# Altium PCB 200G_TX_PCB3.PcbDoc
Units mil, origin at the board's own origin, x right, y up, seen from the top; angles counter-clockwise.
Board outline 4482 x 4168 mil, 4 copper layers (Top Layer, GND, VDD, Bottom Layer), stack 61.811 mil thick; 120 components, 47 nets, 333 pads, 1738 vias.
Unrouted connection lines stored in the file: 11.
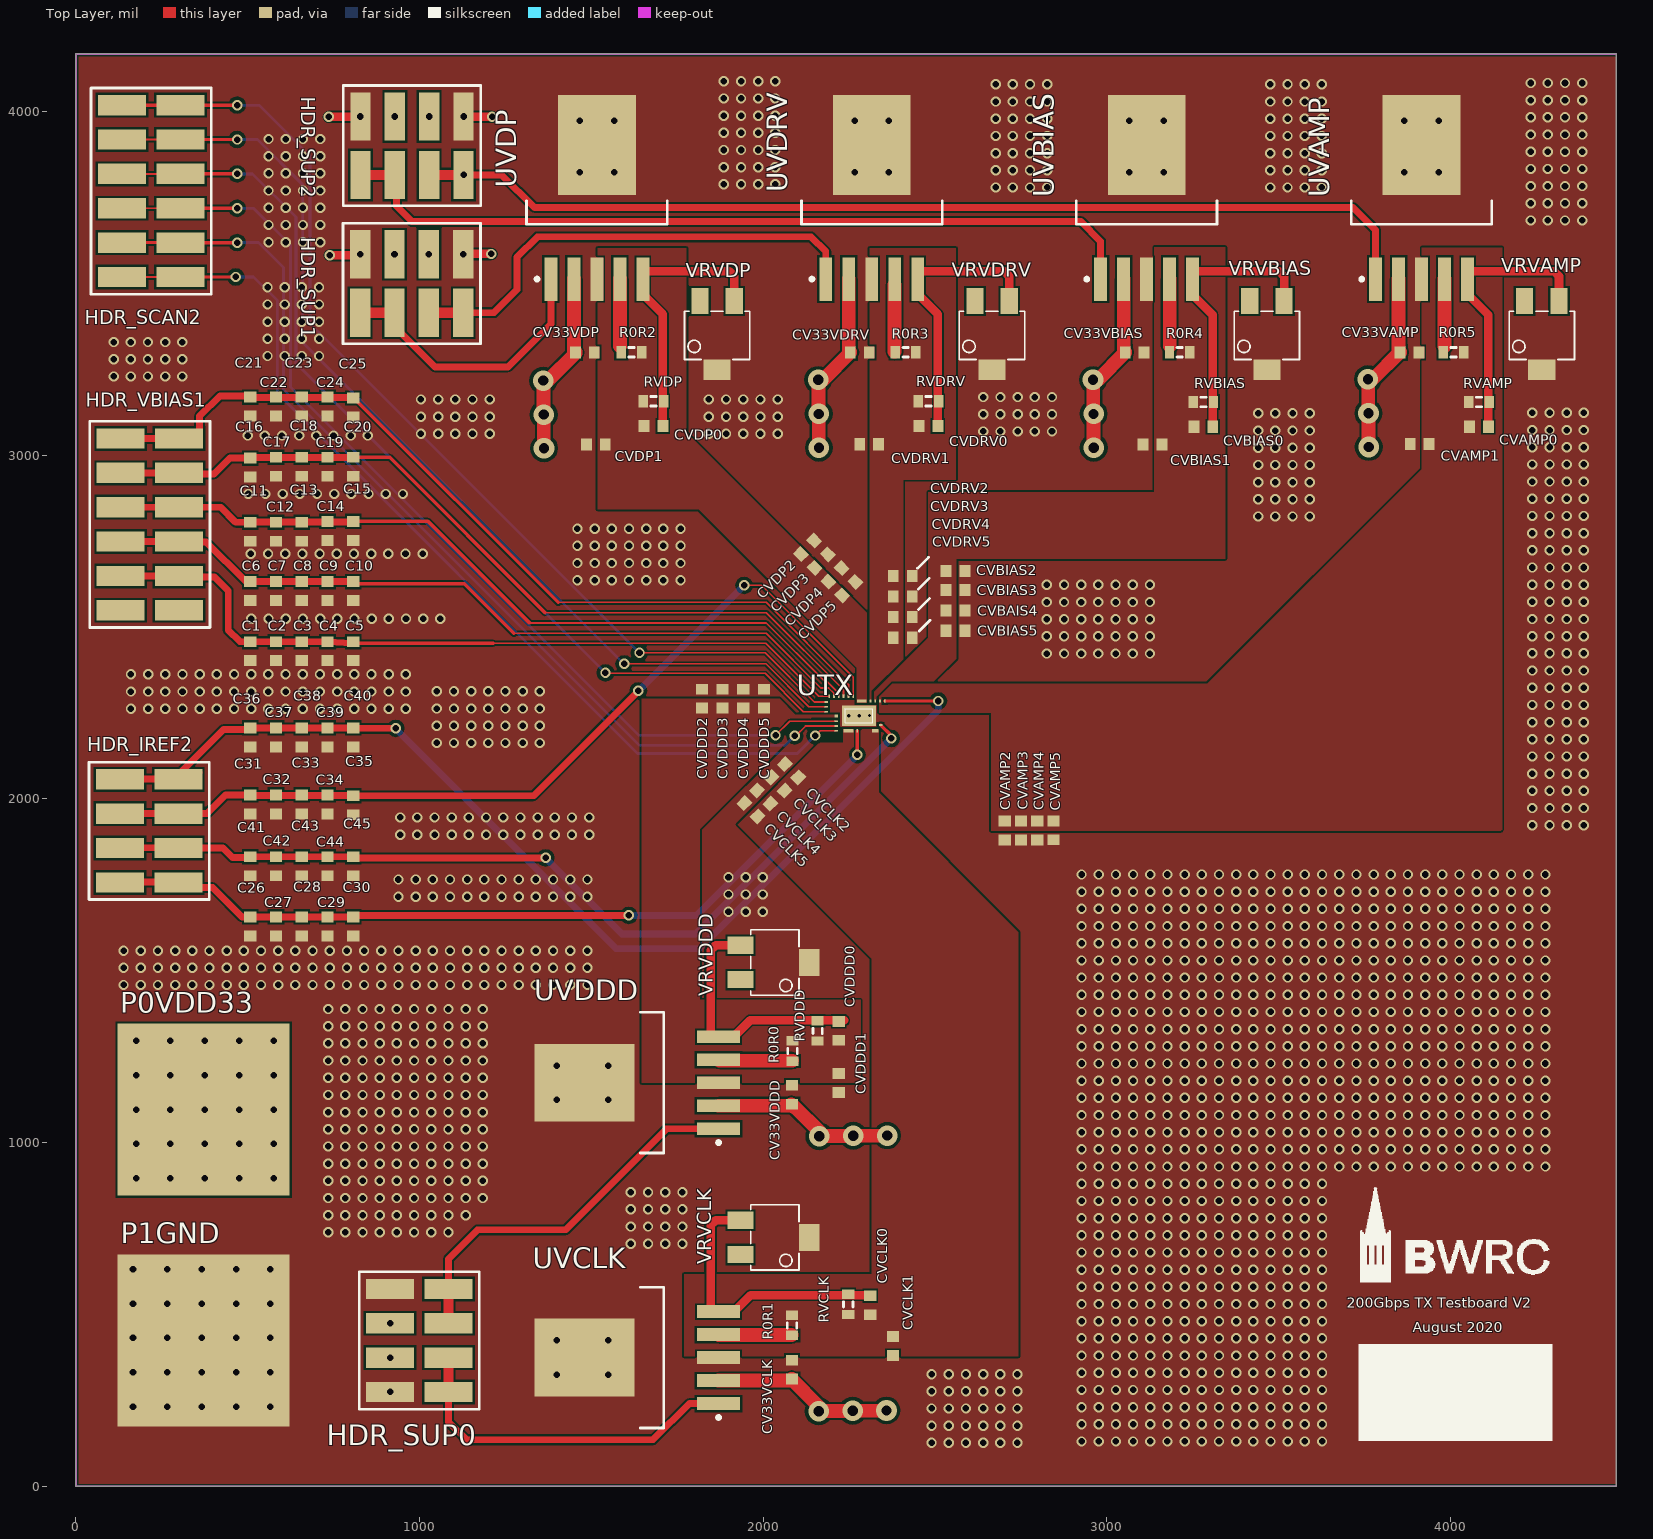
[diagram p0: Top Layer view]
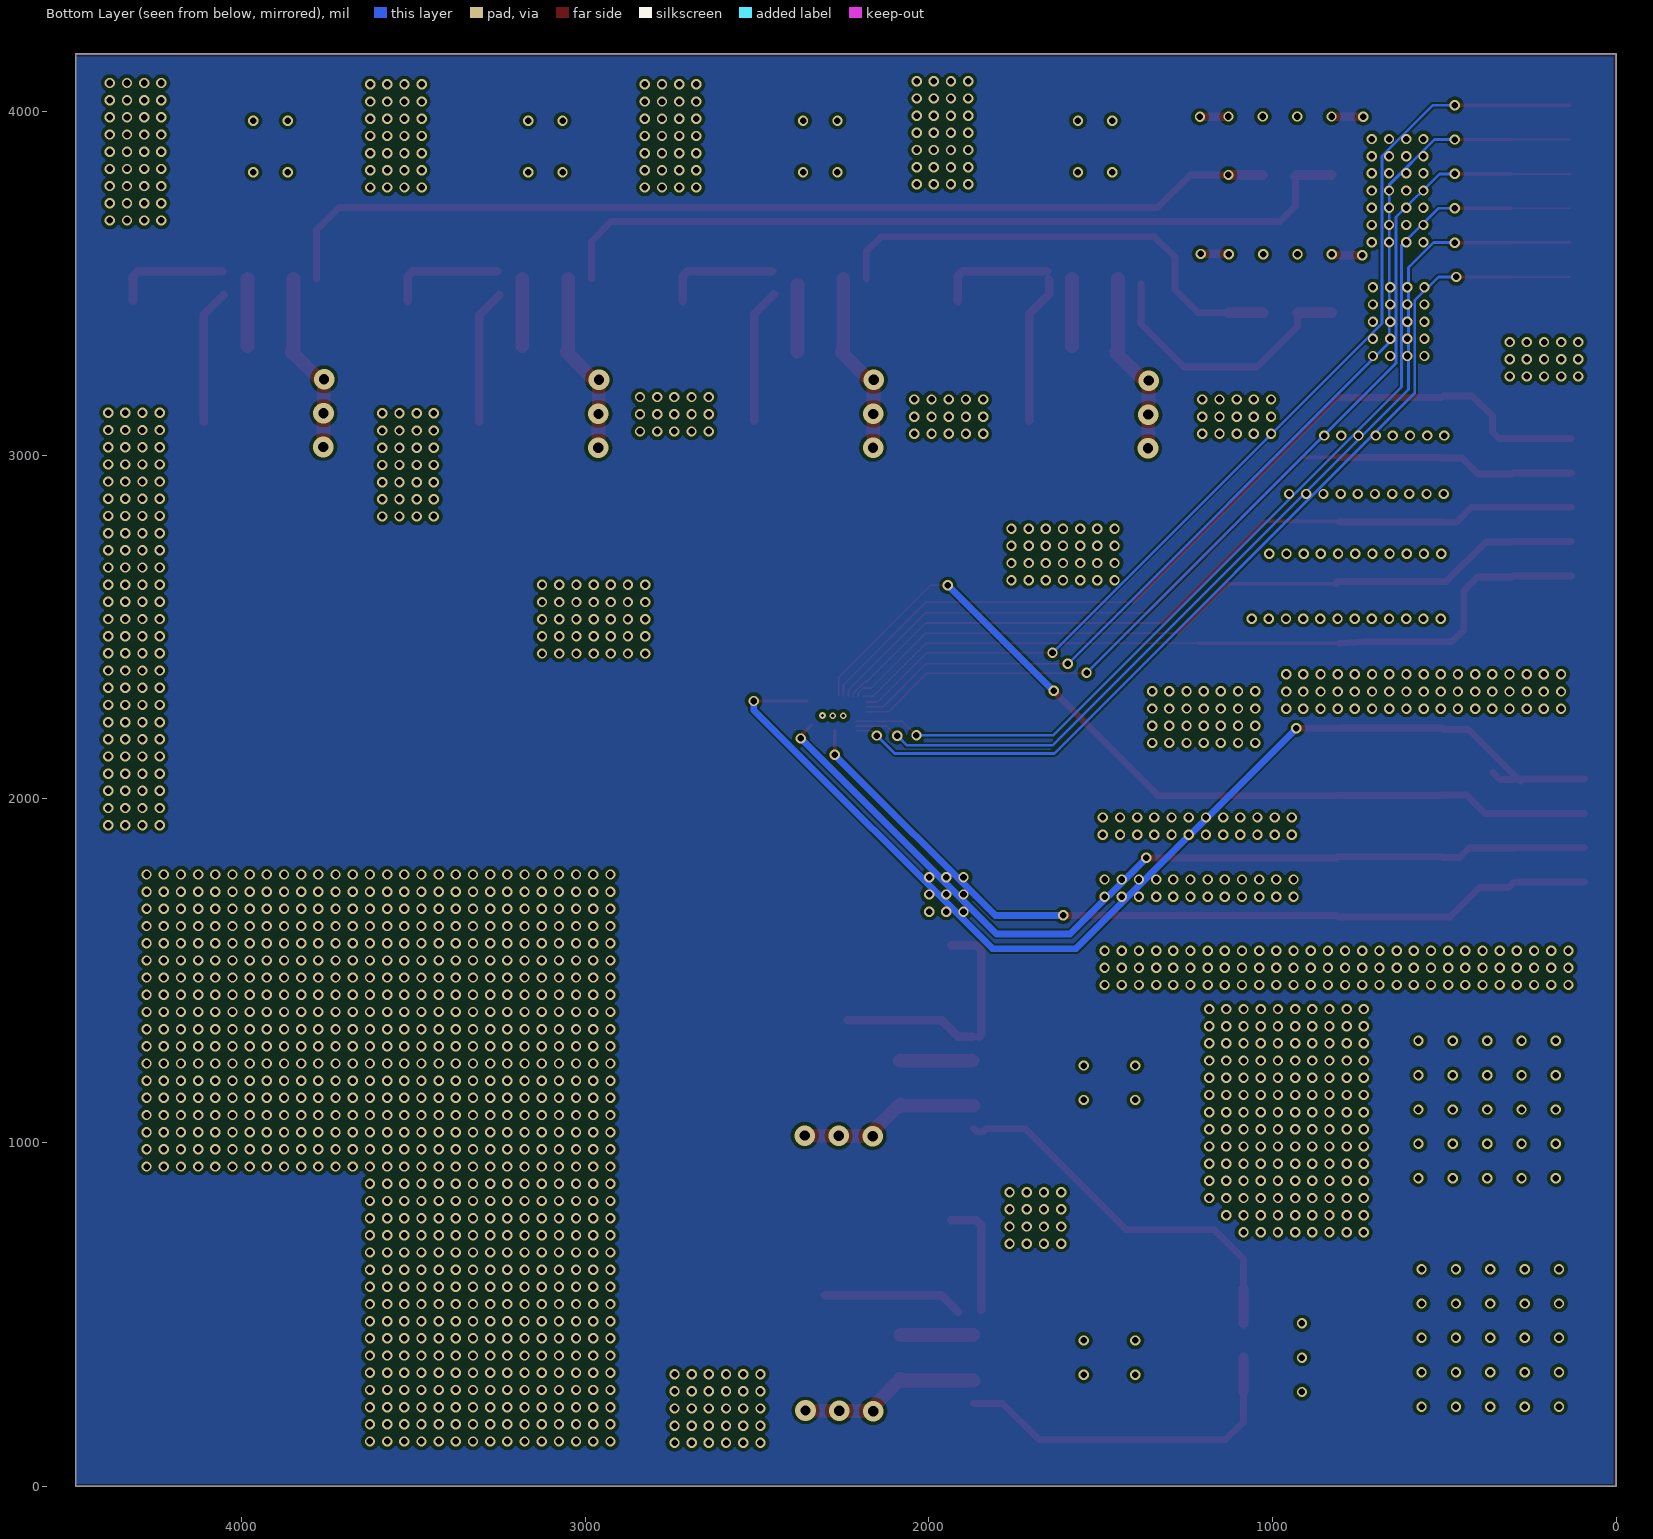
[diagram p1: Bottom Layer view, seen from below]
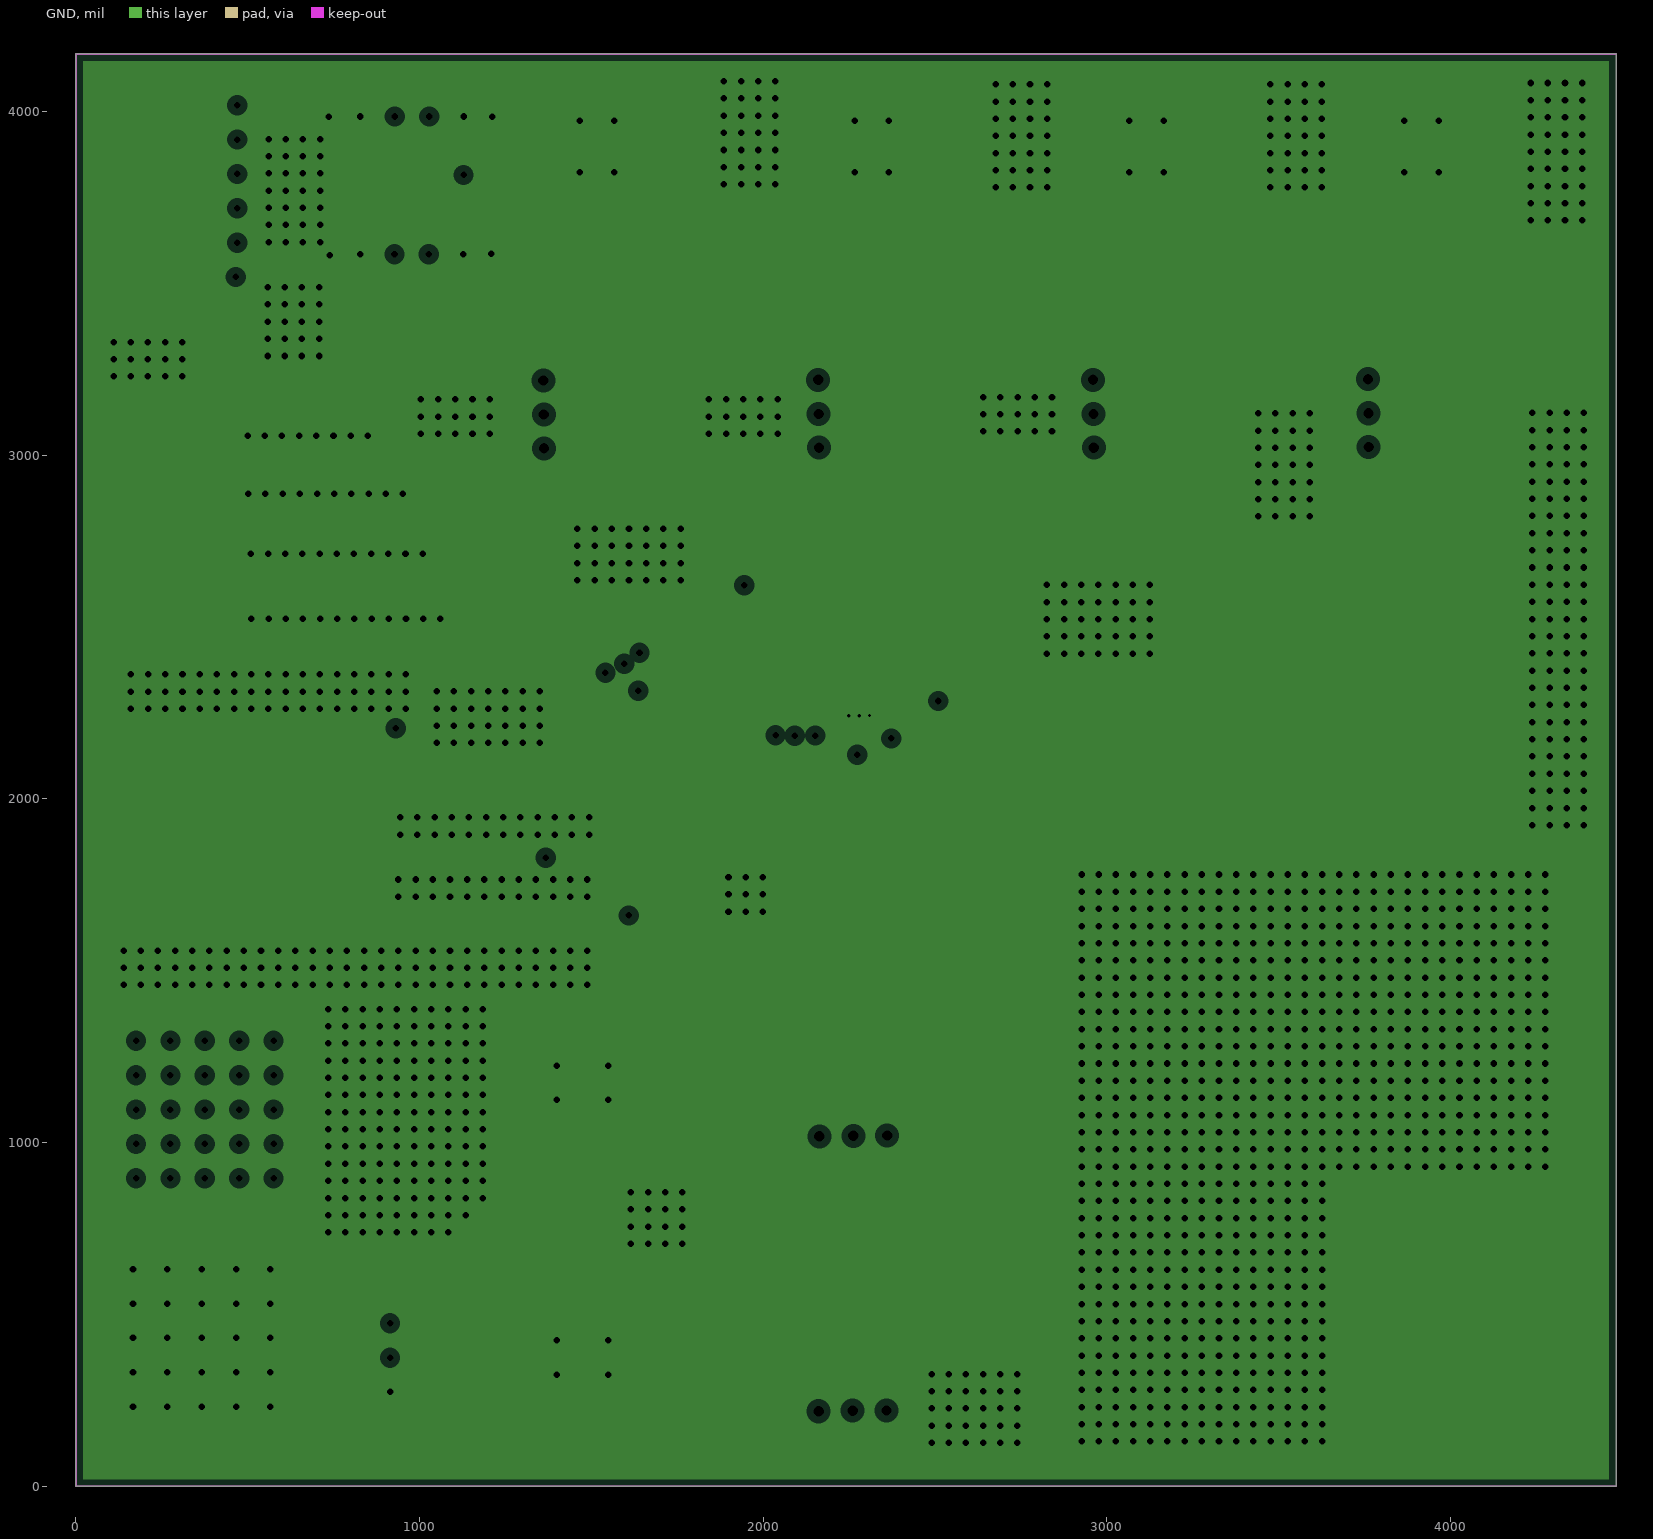
[diagram p2: GND, clearances drawn from the general rule]
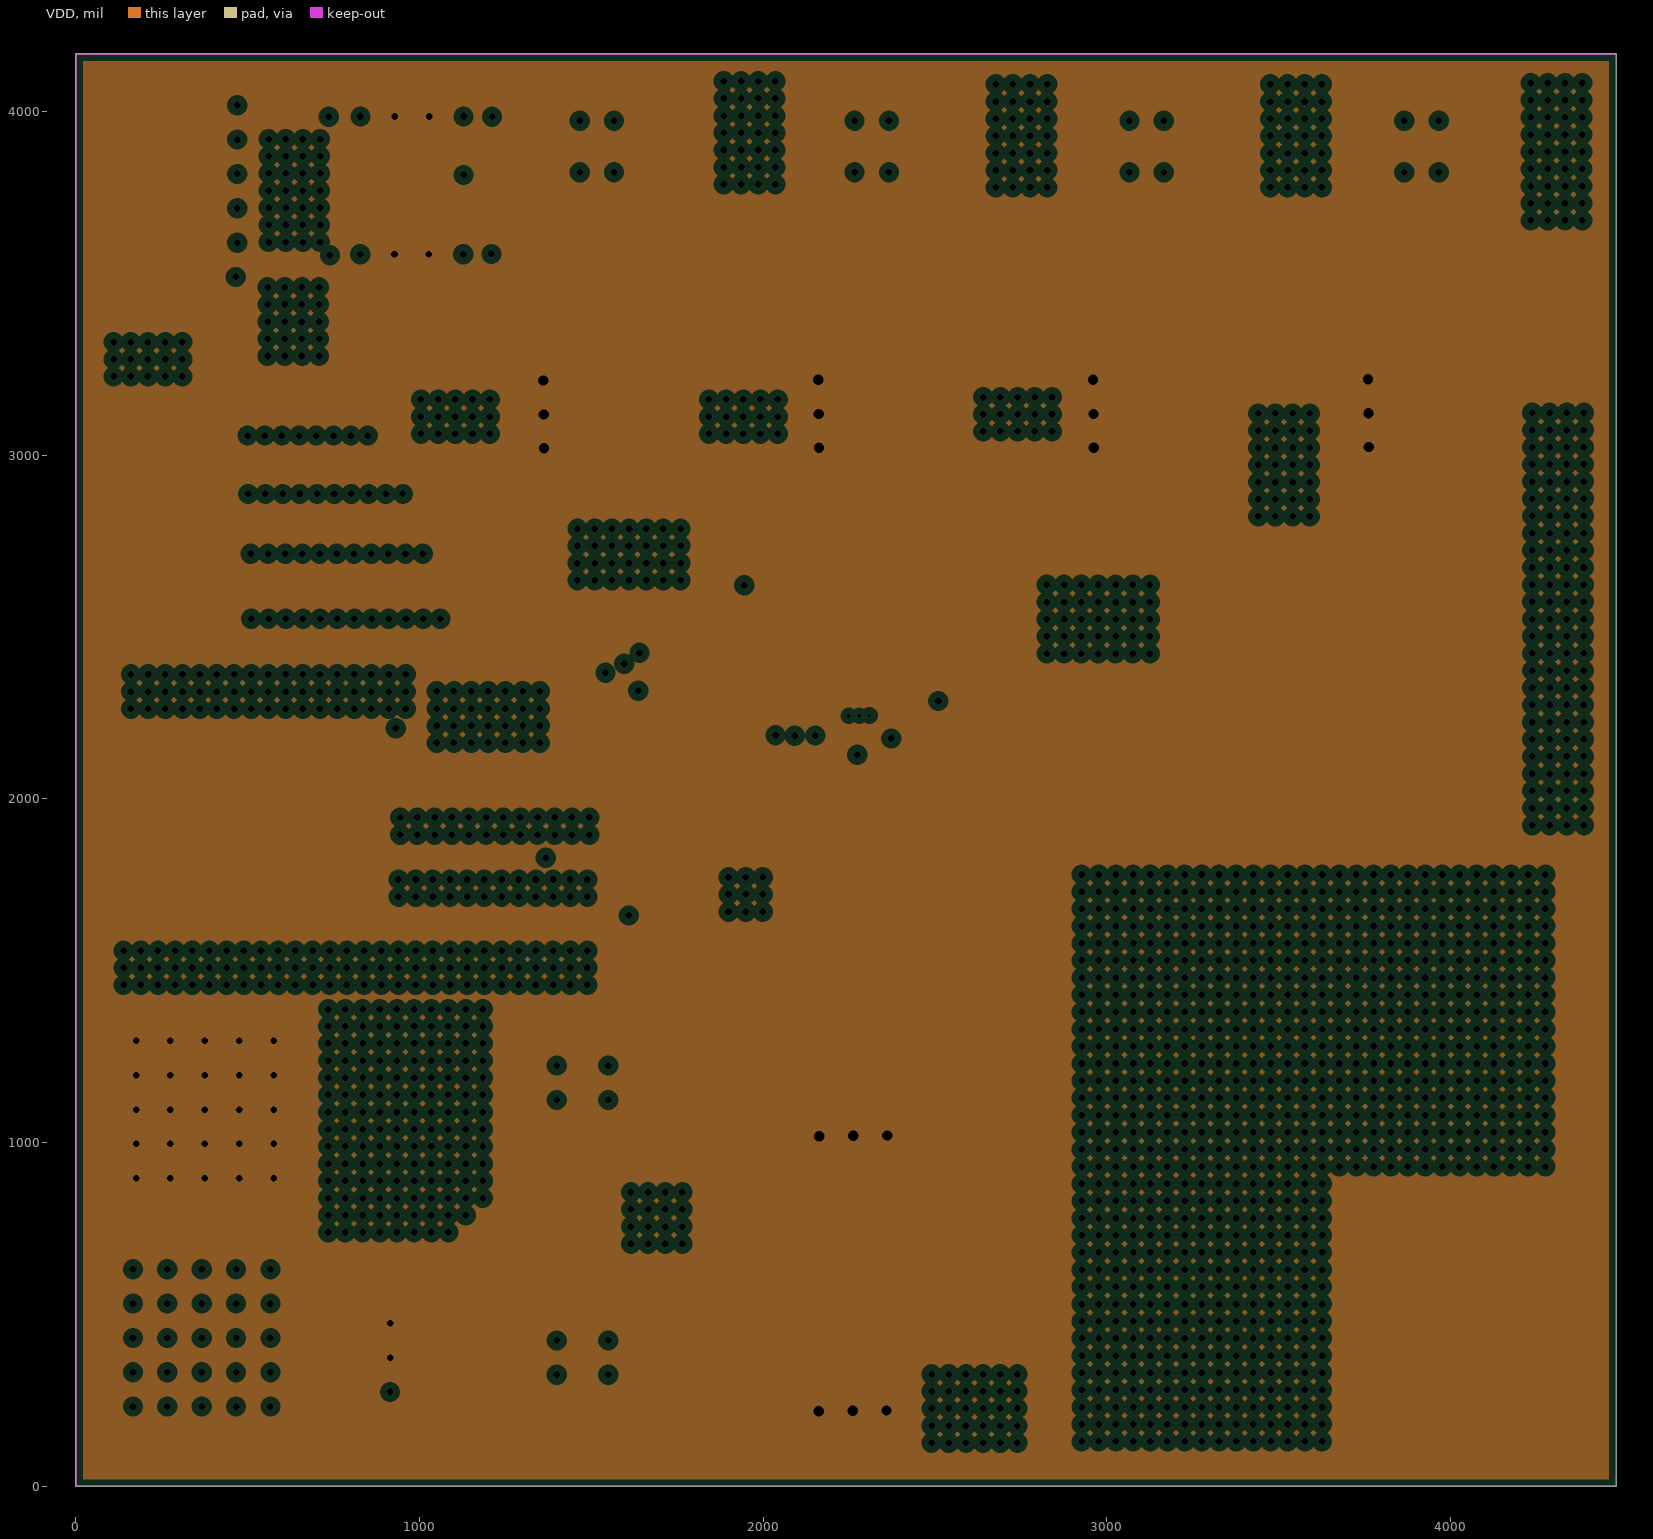
[diagram p3: VDD, clearances drawn from the general rule]

## Layer stack, top to bottom
Top Solder: solder mask 1, Dk 4
Top Layer: signal copper 1.378
Dielectric 2: prepreg 3.937, 2313, Dk 4.05
GND: plane copper 0.689, net GND
Dielectric 1: core 49.803, FR4, Dk 4.3
VDD: plane copper 0.689, net (Multiple Nets)
Dielectric 3: prepreg 3.937, 2313, Dk 4.05
Bottom Layer: signal copper 1.378
Bottom Solder: solder mask 1, Dk 4

## Board outline
0,0 0,4168 4482,4168 4482,0

## Design rules (kind name [scope] priority, off if disabled: settings)
Clearance "Stitching GND" [IsStitchingVia and InNet('GND') vs (IsVia and (Not IsStitchingVia)) Or IsPad] p1: gap=5 ignorepadtopadclearanceinfootprint=FALSE
Clearance [All] p2: gap=0 ignorepadtopadclearanceinfootprint=FALSE except(5: Arc-Arc Arc-Track Arc-Fill Arc-Poly Arc-Region Track-Track Track-Fill Track-Poly Track-Region Fill-Fill Fill-Poly Fill-Region Poly-Poly Poly-Region Region-Region; 6: Arc-SMDPad Arc-THPad Track-SMDPad Track-THPad SMDPad-SMDPad SMDPad-THPad SMDPad-Fill SMDPad-Poly SMDPad-Region THPad-THPad THPad-Fill THPad-Poly THPad-Region; 8: Via-Via; 10: Arc-Via Track-Via SMDPad-Via THPad-Via Via-Fill Via-Poly Via-Region)
HoleSize [All] p1: absolutevalues=TRUE maxlimit=248 minlimit=8 maxpercent=80.000 minpercent=20.000
HoleToHoleClearance [All] p1: gap=20 allowstackedmicrovias=TRUE
MinimumAnnularRing [All] p1: minimumring=5.2
MinimumSolderMaskSliver [All] p1: minsoldermaskwidth=4
PlaneClearance [All] p1: clearance=20
PlaneConnect [All] p1: planeconnectstyle=Relief reliefexpansion=20 reliefentries=4 reliefconductorwidth=10 reliefairgap=10
PolygonConnect [All] p1: connectstyle=Direct reliefconductorwidth=10 reliefentries=4 polygonreliefangle="90 Angle" airgapwidth=10
RoutingVias [All] p1: holewidth=9 width=20 viastyle="Through Hole" minholewidth=9 minwidth=20 maxholewidth=29 maxwidth=40
SilkToSilkClearance [All] p1: silktosilkclearance=5
SilkToSolderMaskClearance [IsPad] p1: minsilkscreentomaskgap=5 clearancetoexposedcopper=TRUE
SolderMaskExpansion [IsStitchingVia] p1: expansion=2
SolderMaskExpansion SolderMaskExpansion_1 [All] p2: expansion=2 useseparateexpansions=TRUE expansionbottom=2
Width [All] p1: maxlimit=40 minlimit=5 preferedwidth=8 minimp=50.000000 maximp=50.000000 favimp=50.000000
23 further rules are at their usual default settings.

## Components (designator, comment, footprint, x,y, rotation, side; value= is the part's Value field where it differs from the comment)
C1 "Cap Semi" 1608[0603] 507,2430 r90 top value=10uF
C2 "Cap Semi" 1608[0603] 582,2430 r90 top value=1uF
C3 "Cap Semi" 1608[0603] 657,2430 r90 top value=100nF
C4 "Cap Semi" 1608[0603] 732,2430 r90 top value=10nF
C5 "Cap Semi" 1608[0603] 807,2430 r90 top value=1nF
C6 "Cap Semi" 1608[0603] 507,2605 r90 top value=10uF
C7 "Cap Semi" 1608[0603] 582,2605 r90 top value=1uF
C8 "Cap Semi" 1608[0603] 657,2605 r90 top value=100nF
C9 "Cap Semi" 1608[0603] 732,2605 r90 top value=10nF
C10 "Cap Semi" 1608[0603] 807,2605 r90 top value=1nF
C11 "Cap Semi" 1608[0603] 507,2777.44 r90 top value=10uF
C12 "Cap Semi" 1608[0603] 582,2777.44 r90 top value=1uF
C13 "Cap Semi" 1608[0603] 657,2777.44 r90 top value=100nF
C14 "Cap Semi" 1608[0603] 732,2780 r90 top value=10nF
C15 "Cap Semi" 1608[0603] 807,2780 r90 top value=1nF
C16 "Cap Semi" 1608[0603] 507,2964.25 r90 top value=10uF
C17 "Cap Semi" 1608[0603] 582,2966.81 r90 top value=1uF
C18 "Cap Semi" 1608[0603] 657,2966.81 r90 top value=100nF
C19 "Cap Semi" 1608[0603] 732,2966.81 r90 top value=10nF
C20 "Cap Semi" 1608[0603] 807,2966.81 r90 top value=1nF
C21 "Cap Semi" 1608[0603] 507,3141.81 r90 top value=10uF
C22 "Cap Semi" 1608[0603] 582,3141.81 r90 top value=1uF
C23 "Cap Semi" 1608[0603] 657,3141.81 r90 top value=100nF
C24 "Cap Semi" 1608[0603] 732,3141.81 r90 top value=10nF
C25 "Cap Semi" 1608[0603] 807,3139.25 r90 top value=1nF
C26 "Cap Semi" 1608[0603] 507,1629 r90 top value=10uF
C27 "Cap Semi" 1608[0603] 582,1629 r90 top value=1uF
C28 "Cap Semi" 1608[0603] 657,1629 r90 top value=100nF
C29 "Cap Semi" 1608[0603] 732,1629 r90 top value=10nF
C30 "Cap Semi" 1608[0603] 807,1629 r90 top value=1nF
C31 "Cap Semi" 1608[0603] 507,1984.12 r90 top value=10uF
C32 "Cap Semi" 1608[0603] 582,1984.12 r90 top value=1uF
C33 "Cap Semi" 1608[0603] 657,1984.12 r90 top value=100nF
C34 "Cap Semi" 1608[0603] 732,1984.12 r90 top value=10nF
C35 "Cap Semi" 1608[0603] 807,1981.56 r90 top value=1nF
C36 "Cap Semi" 1608[0603] 507,2179 r90 top value=10uF
C37 "Cap Semi" 1608[0603] 582,2179 r90 top value=1uF
C38 "Cap Semi" 1608[0603] 657,2179 r90 top value=100nF
C39 "Cap Semi" 1608[0603] 732,2179 r90 top value=10nF
C40 "Cap Semi" 1608[0603] 807,2179 r90 top value=1nF
C41 "Cap Semi" 1608[0603] 507,1804 r90 top value=10uF
C42 "Cap Semi" 1608[0603] 582,1804 r90 top value=1uF
C43 "Cap Semi" 1608[0603] 657,1804 r90 top value=100nF
C44 "Cap Semi" 1608[0603] 732,1804 r90 top value=10nF
C45 "Cap Semi" 1608[0603] 807,1804 r90 top value=1nF
CV33VAMP "Cap Semi" 1608[0603] 3881,3299 r180 top value=10uF
CV33VBIAS "Cap Semi" 1608[0603] 3081,3299 r180 top value=10uF
CV33VCLK "Cap Semi" 1608[0603] 2084,339 r270 top value=10uF
CV33VDDD "Cap Semi" 1608[0603] 2084,1139 r270 top value=10uF
CV33VDP "Cap Semi" 1608[0603] 1481,3299 r180 top value=10uF
CV33VDRV "Cap Semi" 1608[0603] 2281,3299 r180 top value=10uF
CVAMP0 "Cap Semi" 1608[0603] 4083,3083 r180 top value=3.3nF
CVAMP1 "Cap Semi" 1608[0603] 3910.44,3032.5 r0 top value=10uF
CVAMP2 "Cap Semi" 1608[0603] 2703.03,1907.97 r90 top value=1uF
CVAMP3 "Cap Semi" 1608[0603] 2750.18,1907.97 r90 top value=100nF
CVAMP4 "Cap Semi" 1608[0603] 2797.34,1907.97 r90 top value=10nF
CVAMP5 "Cap Semi" 1608[0603] 2844.5,1908.56 r90 top value=1nF
CVBAIS4 "Cap Semi" 1608[0603] 2559.44,2548.5 r180 top value=10nF
CVBIAS0 "Cap Semi" 1608[0603] 3281,3083 r180 top value=3.3nF
CVBIAS1 "Cap Semi" 1608[0603] 3133,3031.5 r0 top value=10uF
CVBIAS2 "Cap Semi" 1608[0603] 2559.44,2663.5 r180 top value=1uF
CVBIAS3 "Cap Semi" 1608[0603] 2559.44,2608 r180 top value=100nF
CVBIAS5 "Cap Semi" 1608[0603] 2559.44,2489.5 r180 top value=1nF
CVCLK0 "Cap Semi" 1608[0603] 2311.5,526.5 r270 top value=3.3nF
CVCLK1 "Cap Semi" 1608[0603] 2377.5,407.5 r90 top value=10uF
CVCLK2 "Cap Semi" 1608[0603] 2082.49,2082.01 r315 top value=1uF
CVCLK3 "Cap Semi" 1608[0603] 2042.99,2043.51 r315 top value=100nF
CVCLK4 "Cap Semi" 1608[0603] 2001.5,2005.5 r315 top value=10nF
CVCLK5 "Cap Semi" 1608[0603] 1964.5,1968.5 r315 top value=1nF
CVDDD0 "Cap Semi" 1608[0603] 2220,1325 r270 top value=3.3nF
CVDDD1 "Cap Semi" 1608[0603] 2220,1173.5 r90 top value=10uF
CVDDD2 "Cap Semi" 1608[0603] 1822,2291.81 r270 top value=1uF
CVDDD3 "Cap Semi" 1608[0603] 1882,2291.81 r270 top value=100nF
CVDDD4 "Cap Semi" 1608[0603] 1942,2291.81 r270 top value=10nF
CVDDD5 "Cap Semi" 1608[0603] 2002,2291.81 r270 top value=1nF
CVDP0 "Cap Semi" 1608[0603] 1680.56,3085 r180 top value=3.3nF
CVDP1 "Cap Semi" 1608[0603] 1512.94,3031.5 r0 top value=10uF
CVDP2 "Cap Semi" 1608[0603] 2129,2732 r225 top value=1uF
CVDP3 "Cap Semi" 1608[0603] 2169,2692 r225 top value=100nF
CVDP4 "Cap Semi" 1608[0603] 2209,2652 r225 top value=10nF
CVDP5 "Cap Semi" 1608[0603] 2249,2612 r225 top value=1nF
CVDRV0 "Cap Semi" 1608[0603] 2481,3085 r180 top value=3.3nF
CVDRV1 "Cap Semi" 1608[0603] 2308.44,3032 r0 top value=10uF
CVDRV2 "Cap Semi" 1608[0603] 2406.19,2649 r180 top value=1uF
CVDRV3 "Cap Semi" 1608[0603] 2406.19,2589 r180 top value=100nF
CVDRV4 "Cap Semi" 1608[0603] 2406.19,2529 r180 top value=10nF
CVDRV5 "Cap Semi" 1608[0603] 2406.19,2469 r180 top value=1nF
HDR_IREF2 "HEADER_2X4_SMT" HEADER_2X4_SMT 213,1907 r0 top
HDR_SCAN2 "HEADER_2X6_SMT" HDR2X6_SMT 219,3769 r0 top
HDR_SUP0 "HEADER_2X4_SMT" HEADER_2X4_SMT 999,424 r0 top
HDR_SUP1 "HEADER_2X4_SMT" HEADER_2X4_SMT 977,3500 r270 top
HDR_SUP2 "HEADER_2X4_SMT" HEADER_2X4_SMT 978,3901 r270 top
HDR_VBIAS1 "HEADER_2X6_SMT" HDR2X6_SMT 215,2799 r0 top
P0VDD33 "BANANA_JACK_SMT" BANANA_JACK_SMT 371.5,1095.99 r90 top
P1GND "BANANA_JACK_SMT" BANANA_JACK_SMT 371.5,424 r0 top
R0R0 "Res3" J1-0603 2085.5,1266.5 r270 top value=0K
R0R1 "Res3" J1-0603 2084,468 r270 top value=0K
R0R2 "Res3" J1-0603 1616.5,3300 r180 top value=0K
R0R3 "Res3" J1-0603 2414.5,3300 r180 top value=0K
R0R4 "Res3" J1-0603 3212,3300 r180 top value=0K
R0R5 "Res3" J1-0603 4009,3300 r180 top value=0K
RVAMP "Res3" J1-0603 4083,3155.5 r180 top value=1.4K
RVBIAS "Res3" J1-0603 3281,3155.5 r180 top value=1.4K
RVCLK "Res3" J1-0603 2247.44,529 r270 top value=1.4K
RVDDD "Res3" J1-0603 2158.5,1325 r270 top value=1.4K
RVDP "Res3" J1-0603 1680.56,3157.5 r180 top value=1.4K
RVDRV "Res3" J1-0603 2481,3157.5 r180 top value=1.4K
UTX "TX_CHIP" TX_CHIP 2279,2242 r0 top locked
UVAMP "LP38511TJ-ADJ" TJ5A_N 3916,3749 r90 top
UVBIAS "LP38511TJ-ADJ" TJ5A_N 3116,3749 r90 top
UVCLK "LP38511TJ-ADJ" TJ5A_N 1634,374 r180 top
UVDDD "LP38511TJ-ADJ" TJ5A_N 1634,1174 r180 top
UVDP "LP38511TJ-ADJ" TJ5A_N 1516,3749 r90 top
UVDRV "LP38511TJ-ADJ" TJ5A_N 2316,3749 r90 top
VRVAMP "5K" POT_3214_Top 4266,3349 r270 top
VRVBIAS "5K" POT_3214_Top 3466,3349 r270 top
VRVCLK "5K" POT_3214_Top 2034,724 r0 top
VRVDDD "5K" POT_3214_Top 2034,1524 r0 top
VRVDP "5K" POT_3214_Top 1866,3349 r270 top
VRVDRV "5K" POT_3214_Top 2666,3349 r270 top

## Footprints (in the part's own frame and the unit in brackets; to place one, negate y for a bottom-side part, rotate by r counter-clockwise, add the part's x,y. Pads: shape width x height; smd on the part's side, far side on the other; paste and mask are expansions set on the pad)
1608[0603] [mm] "Chip Capacitor, Body 1.6x0.8mm, IPC High Density"
  rect 0.8x0.9 smd: 1(-0.7,0) 2(0.7,0)
  body extent -0.87,-0.48 0.87,0.48, height 1.3
BANANA_JACK_SMT [mil]
  rect 500x500 smd: 1(0,0)
HDR2X6_SMT [mil]
  rect 140x59.06 smd: 1(-85,250) 2(-85,150) 3(-85,50) 4(-85,-50) 5(-85,-150) 6(-85,-250) 7(85,250) 8(85,150) 9(85,50) 10(85,-50) 11(85,-150) 12(85,-250)
  silkscreen extent -175,-300 175,300
HEADER_2X4_SMT [mil]
  rect 140x59.06 smd: 1(-85,150) 2(85,150) 3(-85,50) 4(85,50) 5(-85,-50) 6(85,-50) 7(-85,-150) 8(85,-150)
  silkscreen extent -175,-200 175,200
J1-0603 [mm] "Chip Resistor, Body 1.6x0.8mm, IPC High Density"
  rect 0.7x0.9 smd: 1(-0.75,0) 2(0.75,0)
  silkscreen extent -0.2,-0.35 0.2,0.35, body extent -0.85,-0.48 0.85,0.48, height 0.9
POT_3214_Top [mil] "5 turn Trimpot, 3214, Top adjust"
  rect 75x50 smd: 1(-100,50) 3(-100,-50)
  rect 61x79 smd: 2(100,0)
  silkscreen extent -70,-95 70,95, body extent -70,-95 70,95, height 200
TJ5A_N [mm] "D2-PAK, 6-Leads, Body 9.9x10.2mm, Pitch 1.7mm, Lead Span 14mm, IPC Medium Density"
  rect 3.2x0.95 smd: 1(-6,3.4) 2(-6,1.7) 3(-6,0) 4(-6,-1.7) 5(-6,-3.4)
  rect 7.4x5.75 smd: 6(3.9,0)
  silkscreen extent -6.12,-5.2 -0.2,5.2, body extent -1.95,-5.2 8.15,5.2, height 2.1
TX_CHIP [mil]
  rect 100x60 smd paste-100 mask+2: 1(0,0)
  rect 10x5 smd paste-100 mask+2: 2(-96,40) 3(-96,26) 4(-96,12) 5(-67,-16) 6(-67,-30) 7(-67,-44) 11(63,-27)
  rect 10x8 smd paste-100 mask+2: 8(-67,-1)
  rect 30x10 smd paste-100 mask+2: 9(-31,-44)
  rect 20x10 smd paste-100 mask+2: 9(47,-44)
  rect 5x10 smd paste-100 mask+2: 10(-5,-44) 12(75,43) 13(61,43) 14(47,43) 15(33,43) 17(-17,57) 18(-31,57) 19(-45,57) 20(-59,57) 21(-73,57) 22(-87,57)
  rect 28x10 smd paste-100 mask+2: 16(8,43)
  silkscreen extent -40,-20 40,20

## Part data
C1 C2 C3 C4 C5 C6 C7 C8 C9 C10 C11 C12 C13 C14 C15 C16 C17 C18 C19 C20 C21 C22 C23 C24 C25 C26 C27 C28 C29 C30 C31 C32 C33 C34 C35 C36 C37 C38 C39 C40 C41 C42 C43 C44 C45 CV33VAMP CV33VBIAS CV33VCLK CV33VDDD CV33VDP CV33VDRV CVAMP0 CVAMP1 CVAMP2 CVAMP3 CVAMP4 CVAMP5 CVBAIS4 CVBIAS0 CVBIAS1 CVBIAS2 CVBIAS3 CVBIAS5 CVCLK0 CVCLK1 CVCLK2 CVCLK3 CVCLK4 CVCLK5 CVDDD0 CVDDD1 CVDDD2 CVDDD3 CVDDD4 CVDDD5 CVDP0 CVDP1 CVDP2 CVDP3 CVDP4 CVDP5 CVDRV0 CVDRV1 CVDRV2 CVDRV3 CVDRV4 CVDRV5: "Capacitor (Semiconductor SIM Model)", LatestRevisionDate=29-May-2009, LatestRevisionNote="IPC-7351 Footprint Added.", PackageDescription="Chip Capacitor", PackageReference=C1206, Published=8-Jun-2000, Publisher="Altium Limited"
R0R0 R0R1 R0R2 R0R3 R0R4 R0R5 RVAMP RVBIAS RVCLK RVDDD RVDP RVDRV: "Resistor", LatestRevisionDate=29-May-2009, LatestRevisionNote="IPC-7351 Footprint Added.", PackageDescription="Chip Resistor", PackageReference=J1-0603, Published=8-Jun-2000, Publisher="Altium Limited"
UVAMP UVBIAS UVCLK UVDDD UVDP UVDRV: "800 mA Fast-Transient Response Low-Dropout Linear Voltage Regulator with Error Flag, 6-pin TO-263 Thin", Manufacturer="National Semiconductor", PackageTopMarking=NSUZXYTTE#*LP38511*TJ-ADJ, PowerWise=N, ComponentLink1Description="Manufacturer URL", ComponentLink1URL=http://www.national.com/, ComponentLink2Description="LP38511 Datasheet", ComponentLink2URL=http://www.national.com/ds/LP/LP38511-ADJ.pdf, ComponentLink3Description="LP38511 Web Page", ComponentLink3URL=http://www.national.com/pf/LP/LP38511.html, ComponentLink4Description="TJ5A Package Page", ComponentLink4URL=http://www.national.com/packaging/folders/tj5a.html, CompType="LDO IC", DatasheetVersion=Feb-2009, High-Reliability=Y, PackageDescription="Thin TO-263, Molded, 9.85 x 10.16 x 2mm Body, 5 Lead, 1.7mm Pitch, Surface Mount", PackageReference=TJ5A, PackageVersion="revE, Jan-2008", PartNumber=LP38511TJ-ADJ, PinCount=5, RoHS=Y
VRVAMP VRVBIAS VRVCLK VRVDDD VRVDP VRVDRV: library part RPot_5K, "Potentiometer", Manufacturer=Bourns, Manufacturer ID=3214X-1-502E, Digikey ID=3214X-1-502ECT-ND

## Via types
v1: diameter 30, hole 19, Top Layer to Bottom Layer, 1717 vias
v2: diameter 60, hole 30, Top Layer to Bottom Layer, 18 vias
v3: diameter 20, hole 9, Top Layer to Bottom Layer, 3 vias

## Nets (pads, with @x,y where several pads share a name; then routed paths per layer and width w, separated by ;. In a path a pad name is that pad's centre, name@x,y a point inside that pad or via, vN(x,y) a via of type N, cw(c..) or ccw(c..) an arc to the next point about the centre after c; other vN are vias at no path point)
EN_VAMP: HDR_SUP2.2 HDR_SUP2.4 UVAMP.1 | length 2963.6
  Top Layer w20: v1(1128,3816) 1239,3816 1334,3721 3717,3721 3782.14,3655.86 UVAMP.1
  Top Layer w30: HDR_SUP2.4 v1(1128,3816)
EN_VBIAS: HDR_SUP2.6 HDR_SUP2.8 UVBIAS.1 | length 2394.6
  Top Layer w20: HDR_SUP2.6@933,3811 933,3725 978,3680 2925,3680 2982.14,3622.86 UVBIAS.1
  Top Layer w30: HDR_SUP2.8 HDR_SUP2.6 HDR_SUP2.6@933,3811
EN_VCLK: HDR_SUP0.6 HDR_SUP0.8 UVCLK.1 | length 1038.3
  Top Layer w20: HDR_SUP0.8 1084,187 1136,135 1680,135 1785.14,240.14 UVCLK.1
  Top Layer w30: HDR_SUP0.8 HDR_SUP0.6
EN_VDDD: HDR_SUP0.2 HDR_SUP0.4 UVDDD.1 | length 1137.4
  Top Layer w20: HDR_SUP0.2 1084,661 1169,746 1425,746 1719,1040 1832.69,1040 1841.25,1031.44 1861.52,1031.44 UVDDD.1
  Top Layer w30: HDR_SUP0.4 HDR_SUP0.2
EN_VDP: HDR_SUP1.6 HDR_SUP1.8 UVDP.1 | length 813
  Top Layer w20: HDR_SUP1.6 927,3374.53 1044.53,3257 1257,3257 1382.14,3382.14 UVDP.1@1382.14,3499
  Top Layer w30: HDR_SUP1.8 HDR_SUP1.6
EN_VDRV: HDR_SUP1.2 HDR_SUP1.4 UVDRV.1 | length 1400.3
  Top Layer w20: HDR_SUP1.2 1217,3415 1284,3482 1284,3577 1343,3636 2139,3636 2182.14,3592.86 UVDRV.1
  Top Layer w30: HDR_SUP1.4 HDR_SUP1.2
FFEB0: C1.2 C2.2 C3.2 C4.2 C5.2 HDR_VBIAS1.5 HDR_VBIAS1.11 UTX.22 | length 2272.3
  Top Layer w5: 1214.44,2453.06 2007.94,2453.06 2162,2299 UTX.22
  Top Layer w10: C5.2@805,2453.06 1214.44,2453.06
  Top Layer w20: HDR_VBIAS1.5 HDR_VBIAS1.11 303,2646 403,2646 443,2606 443,2491.56 477,2457.56 C1.2 C2.2 C3.2 C4.2 C5.2@805,2453.06
FFEB1: C6.2 C7.2 C8.2 C9.2 C10.2 HDR_VBIAS1.4 HDR_VBIAS1.10 UTX.21 | length 2267.1
  Top Layer w5: 1274.5,2482 2009,2482 2168,2323 2190,2323 2206,2307 UTX.21
  Top Layer w10: C10.2@814.72,2626.81 1129.69,2626.81 1274.5,2482
  Top Layer w20: HDR_VBIAS1.4 HDR_VBIAS1.10 301,2748 379,2748 494.44,2632.56 C6.2 C7.2 C8.2 C9.2 C10.2 808.97,2632.56 C10.2@814.72,2626.81
FFEB2: C11.2 C12.2 C13.2 C14.2 C15.2 HDR_VBIAS1.3 HDR_VBIAS1.9 UTX.20 | length 2322.9
  Top Layer w5: 1320,2512 2009,2512 2179,2342 2185.14,2342 2220,2307.14 UTX.20
  Top Layer w10: C15.2 1024.44,2807.56 1320,2512
  Top Layer w20: HDR_VBIAS1.3 HDR_VBIAS1.9 421,2849 465,2805 C11.2 508.28,2806.28 657,2806.28 C15.2@805.72,2806.28
FFEB3: C16.2 C17.2 C18.2 C19.2 C20.2 HDR_VBIAS1.2 HDR_VBIAS1.8 UTX.19 | length 2423.9
  Top Layer w5: 1365,2542 2009,2542 2234,2317 UTX.19
  Top Layer w10: C20.2 912.63,2994.37 1365,2542
  Top Layer w20: HDR_VBIAS1.2 HDR_VBIAS1.8 303,2946 402,2946 447.81,2991.81 C16.2 508.28,2993.09 805.72,2993.09 C20.2
FFEB4: C21.2 C22.2 C23.2 C24.2 C25.2 HDR_VBIAS1.1 HDR_VBIAS1.7 UTX.18 | length 2576.1
  Top Layer w5: C25.2 C25.2@808.97,3166.81 ; 1403.78,2572 2009,2572 2248,2333 UTX.18
  Top Layer w10: C25.2@808.97,3166.81 1403.78,2572
  Top Layer w20: HDR_VBIAS1.1 HDR_VBIAS1.7 340.47,3049 360,3068.53 360,3114 419,3173 503.37,3173 C21.2 508.28,3168.09 C25.2@805.72,3168.09
GND: C1.1 C2.1 C3.1 C4.1 C5.1 C6.1 C7.1 C8.1 C9.1 C10.1 C11.1 C12.1 C13.1 C14.1 C15.1 C16.1 C17.1 C18.1 C19.1 C20.1 C21.1 C22.1 C23.1 C24.1 C25.1 C26.1 C27.1 C28.1 C29.1 C30.1 C31.1 C32.1 C33.1 C34.1 C35.1 C36.1 C37.1 C38.1 C39.1 C40.1 C41.1 C42.1 C43.1 C44.1 C45.1 CV33VAMP.1 CV33VBIAS.1 CV33VCLK.1 CV33VDDD.1 CV33VDP.1 CV33VDRV.1 CVAMP1.1 CVAMP2.1 CVAMP3.1 CVAMP4.1 CVAMP5.1 CVBAIS4.1 CVBIAS1.1 CVBIAS2.1 CVBIAS3.1 CVBIAS5.1 CVCLK1.1 CVCLK2.1 CVCLK3.1 CVCLK4.1 CVCLK5.1 CVDDD1.1 CVDDD2.1 CVDDD3.1 CVDDD4.1 CVDDD5.1 CVDP1.1 CVDP2.1 CVDP3.1 CVDP4.1 CVDP5.1 CVDRV1.1 CVDRV2.1 CVDRV3.1 CVDRV4.1 CVDRV5.1 HDR_SUP0.1 HDR_SUP0.7 HDR_SUP1.1 HDR_SUP1.7 HDR_SUP2.1 HDR_SUP2.7 P1GND.1 UTX.1 UVAMP.3 UVAMP.6 UVBIAS.3 UVBIAS.6 UVCLK.3 UVCLK.6 UVDDD.3 UVDDD.6 UVDP.3 UVDP.6 UVDRV.3 UVDRV.6 VRVAMP.2 VRVBIAS.2 VRVCLK.2 VRVDDD.2 VRVDP.2 VRVDRV.2 | length 347.5
  Top Layer w25: v1(736,3985) 827,3985 v1(828,3986) ; v1(739,3582) 824,3582 v1(827,3585) ; v1(1127,3585) 1128,3586 v1(1209,3586) ; v1(1128,3986) 1129,3985 v1(1211,3985)
  other v1: 2490,126 2540,126 2590,126 2640,126 2690,126 2740,126 2926.5,130 2976.5,130 3026.5,130 3076.5,130 3126.5,130 3176.5,130 3226.5,130 3276.5,130 3326.5,130 3376.5,130 3426.5,130 3476.5,130 3526.5,130 3576.5,130 3626.5,130 2490,176 2540,176 2590,176 2640,176 2690,176 2740,176 2926.5,180 2976.5,180 3026.5,180 3076.5,180 3126.5,180 3176.5,180 3226.5,180 3276.5,180 3326.5,180 3376.5,180 3426.5,180 3476.5,180 3526.5,180 3576.5,180 3626.5,180 2490,226 2540,226 2590,226 2640,226 2690,226 2740,226 2926.5,230 2976.5,230 3026.5,230 3076.5,230 3126.5,230 3176.5,230 3226.5,230 3276.5,230 3326.5,230 3376.5,230 3426.5,230 3476.5,230 3526.5,230 3576.5,230 3626.5,230 166,231.43 266,231.43 366,231.43 466,231.43 566,231.43 914,274 2490,276 2540,276 2590,276 2640,276 2690,276 2740,276 2926.5,280 2976.5,280 3026.5,280 3076.5,280 3126.5,280 3176.5,280 3226.5,280 3276.5,280 3326.5,280 3376.5,280 3426.5,280 3476.5,280 3526.5,280 3576.5,280 3626.5,280 1399,324 1549,324 2490,326 2540,326 2590,326 2640,326 2690,326 2740,326 2926.5,330 2976.5,330 3026.5,330 3076.5,330 3126.5,330 3176.5,330 3226.5,330 3276.5,330 3326.5,330 3376.5,330 3426.5,330 3476.5,330 3526.5,330 3576.5,330 3626.5,330 166,331.43 266,331.43 366,331.43 466,331.43 566,331.43 2926.5,380 2976.5,380 3026.5,380 3076.5,380 3126.5,380 3176.5,380 3226.5,380 3276.5,380 3326.5,380 3376.5,380 3426.5,380 3476.5,380 3526.5,380 3576.5,380 3626.5,380 1399,424 1549,424 2926.5,430 2976.5,430 3026.5,430 3076.5,430 3126.5,430 3176.5,430 3226.5,430 3276.5,430 3326.5,430 3376.5,430 3426.5,430 3476.5,430 3526.5,430 3576.5,430 3626.5,430 166,431.43 266,431.43 366,431.43 466,431.43 566,431.43 2926.5,480 2976.5,480 3026.5,480 3076.5,480 3126.5,480 3176.5,480 3226.5,480 3276.5,480 3326.5,480 3376.5,480 3426.5,480 3476.5,480 3526.5,480 3576.5,480 3626.5,480 2926.5,530 2976.5,530 3026.5,530 3076.5,530 3126.5,530 3176.5,530 3226.5,530 3276.5,530 3326.5,530 3376.5,530 3426.5,530 3476.5,530 3526.5,530 3576.5,530 3626.5,530 166,531.43 266,531.43 366,531.43 466,531.43 566,531.43 2926.5,580 2976.5,580 3026.5,580 3076.5,580 3126.5,580 3176.5,580 3226.5,580 3276.5,580 3326.5,580 3376.5,580 3426.5,580 3476.5,580 3526.5,580 3576.5,580 3626.5,580 2926.5,630 2976.5,630 3026.5,630 3076.5,630 3126.5,630 3176.5,630 3226.5,630 3276.5,630 3326.5,630 3376.5,630 3426.5,630 3476.5,630 3526.5,630 3576.5,630 3626.5,630 166,631.43 266,631.43 366,631.43 466,631.43 566,631.43 2926.5,680 2976.5,680 3026.5,680 3076.5,680 3126.5,680 3176.5,680 3226.5,680 3276.5,680 3326.5,680 3376.5,680 3426.5,680 3476.5,680 3526.5,680 3576.5,680 3626.5,680 1615,705.5 1665,705.5 1715,705.5 1765,705.5 2926.5,730 2976.5,730 3026.5,730 3076.5,730 3126.5,730 3176.5,730 3226.5,730 3276.5,730 3326.5,730 3376.5,730 3426.5,730 3476.5,730 3526.5,730 3576.5,730 3626.5,730 734,738.5 784,738.5 834,738.5 884,738.5 934,738.5 984,738.5 1034,738.5 1084,738.5 1615,755.5 1665,755.5 1715,755.5 1765,755.5 2926.5,780 2976.5,780 3026.5,780 3076.5,780 3126.5,780 3176.5,780 3226.5,780 3276.5,780 3326.5,780 3376.5,780 3426.5,780 3476.5,780 3526.5,780 3576.5,780 3626.5,780 734,788.5 784,788.5 834,788.5 884,788.5 934,788.5 984,788.5 1034,788.5 1084,788.5 1134,788.5 1615,805.5 1665,805.5 1715,805.5 1765,805.5 2926.5,830 2976.5,830 3026.5,830 3076.5,830 3126.5,830 3176.5,830 3226.5,830 3276.5,830 3326.5,830 3376.5,830 3426.5,830 3476.5,830 3526.5,830 3576.5,830 3626.5,830 734,838.5 784,838.5 834,838.5 884,838.5 934,838.5 984,838.5 1034,838.5 1084,838.5 1134,838.5 1184,838.5 1615,855.5 1665,855.5 1715,855.5 1765,855.5 2926.5,880 2976.5,880 3026.5,880 3076.5,880 3126.5,880 3176.5,880 3226.5,880 3276.5,880 3326.5,880 3376.5,880 3426.5,880 3476.5,880 3526.5,880 3576.5,880 3626.5,880 734,888.5 784,888.5 834,888.5 884,888.5 934,888.5 984,888.5 1034,888.5 1084,888.5 1134,888.5 1184,888.5 2926.5,930 2976.5,930 3026.5,930 3076.5,930 3126.5,930 3176.5,930 3226.5,930 3276.5,930 3326.5,930 3376.5,930 3426.5,930 3476.5,930 3526.5,930 3576.5,930 3626.5,930 3676.5,930 3726.5,930 3776.5,930 3826.5,930 3876.5,930 3926.5,930 3976.5,930 4026.5,930 4076.5,930 4126.5,930 4176.5,930 4226.5,930 4276.5,930 734,938.5 784,938.5 834,938.5 884,938.5 934,938.5 984,938.5 1034,938.5 1084,938.5 1134,938.5 1184,938.5 2926.5,980 2976.5,980 3026.5,980 3076.5,980 3126.5,980 3176.5,980 3226.5,980 3276.5,980 3326.5,980 3376.5,980 3426.5,980 3476.5,980 3526.5,980 3576.5,980 3626.5,980 3676.5,980 3726.5,980 3776.5,980 3826.5,980 3876.5,980 3926.5,980 3976.5,980 4026.5,980 4076.5,980 4126.5,980 4176.5,980 4226.5,980 4276.5,980 734,988.5 784,988.5 834,988.5 884,988.5 934,988.5 984,988.5 1034,988.5 1084,988.5 1134,988.5 1184,988.5 2926.5,1030 2976.5,1030 3026.5,1030 3076.5,1030 3126.5,1030 3176.5,1030 3226.5,1030 3276.5,1030 3326.5,1030 3376.5,1030 3426.5,1030 3476.5,1030 3526.5,1030 3576.5,1030 3626.5,1030 3676.5,1030 3726.5,1030 3776.5,1030 3826.5,1030 3876.5,1030 3926.5,1030 3976.5,1030 4026.5,1030 4076.5,1030 4126.5,1030 4176.5,1030 4226.5,1030 4276.5,1030 734,1038.5 784,1038.5 834,1038.5 884,1038.5 934,1038.5 984,1038.5 1034,1038.5 1084,1038.5 1134,1038.5 1184,1038.5 2926.5,1080 2976.5,1080 3026.5,1080 3076.5,1080 3126.5,1080 3176.5,1080 3226.5,1080 3276.5,1080 3326.5,1080 3376.5,1080 3426.5,1080 3476.5,1080 3526.5,1080 3576.5,1080 3626.5,1080 3676.5,1080 3726.5,1080 3776.5,1080 3826.5,1080 3876.5,1080 3926.5,1080 3976.5,1080 4026.5,1080 4076.5,1080 4126.5,1080 4176.5,1080 4226.5,1080 4276.5,1080 734,1088.5 784,1088.5 834,1088.5 884,1088.5 934,1088.5 984,1088.5 1034,1088.5 1084,1088.5 1134,1088.5 1184,1088.5 1399,1124 1549,1124 2926.5,1130 2976.5,1130 3026.5,1130 3076.5,1130 3126.5,1130 3176.5,1130 3226.5,1130 3276.5,1130 3326.5,1130 3376.5,1130 3426.5,1130 3476.5,1130 3526.5,1130 3576.5,1130 3626.5,1130 3676.5,1130 3726.5,1130 3776.5,1130 3826.5,1130 3876.5,1130 3926.5,1130 3976.5,1130 4026.5,1130 4076.5,1130 4126.5,1130 4176.5,1130 4226.5,1130 4276.5,1130 734,1138.5 784,1138.5 834,1138.5 884,1138.5 934,1138.5 984,1138.5 1034,1138.5 1084,1138.5 1134,1138.5 1184,1138.5 2926.5,1180 2976.5,1180 3026.5,1180 3076.5,1180 3126.5,1180 3176.5,1180 3226.5,1180 3276.5,1180 3326.5,1180 3376.5,1180 3426.5,1180 3476.5,1180 3526.5,1180 3576.5,1180 3626.5,1180 3676.5,1180 3726.5,1180 3776.5,1180 3826.5,1180 3876.5,1180 3926.5,1180 3976.5,1180 4026.5,1180 4076.5,1180 4126.5,1180 4176.5,1180 4226.5,1180 4276.5,1180 734,1188.5 784,1188.5 834,1188.5 884,1188.5 934,1188.5 984,1188.5 1034,1188.5 1084,1188.5 1134,1188.5 1184,1188.5 1399,1224 1549,1224 2926.5,1230 2976.5,1230 3026.5,1230 3076.5,1230 3126.5,1230 3176.5,1230 3226.5,1230 3276.5,1230 3326.5,1230 3376.5,1230 3426.5,1230 3476.5,1230 3526.5,1230 3576.5,1230 3626.5,1230 3676.5,1230 3726.5,1230 3776.5,1230 3826.5,1230 3876.5,1230 3926.5,1230 3976.5,1230 4026.5,1230 4076.5,1230 4126.5,1230 4176.5,1230 4226.5,1230 4276.5,1230 734,1238.5 784,1238.5 834,1238.5 884,1238.5 934,1238.5 984,1238.5 1034,1238.5 1084,1238.5 1134,1238.5 1184,1238.5 2926.5,1280 2976.5,1280 3026.5,1280 3076.5,1280 3126.5,1280 3176.5,1280 3226.5,1280 3276.5,1280 3326.5,1280 3376.5,1280 3426.5,1280 3476.5,1280 3526.5,1280 3576.5,1280 3626.5,1280 3676.5,1280 3726.5,1280 3776.5,1280 3826.5,1280 3876.5,1280 3926.5,1280 3976.5,1280 4026.5,1280 4076.5,1280 4126.5,1280 4176.5,1280 4226.5,1280 4276.5,1280 734,1288.5 784,1288.5 834,1288.5 884,1288.5 934,1288.5 984,1288.5 1034,1288.5 1084,1288.5 1134,1288.5 1184,1288.5 2926.5,1330 2976.5,1330 3026.5,1330 3076.5,1330 3126.5,1330 3176.5,1330 3226.5,1330 3276.5,1330 3326.5,1330 3376.5,1330 3426.5,1330 3476.5,1330 3526.5,1330 3576.5,1330 3626.5,1330 3676.5,1330 3726.5,1330 3776.5,1330 3826.5,1330 3876.5,1330 3926.5,1330 3976.5,1330 4026.5,1330 4076.5,1330 4126.5,1330 4176.5,1330 4226.5,1330 4276.5,1330 734,1338.5 784,1338.5 834,1338.5 884,1338.5 934,1338.5 984,1338.5 1034,1338.5 1084,1338.5 1134,1338.5 1184,1338.5 2926.5,1380 2976.5,1380 3026.5,1380 3076.5,1380 3126.5,1380 3176.5,1380 3226.5,1380 3276.5,1380 3326.5,1380 3376.5,1380 3426.5,1380 3476.5,1380 3526.5,1380 3576.5,1380 3626.5,1380 3676.5,1380 3726.5,1380 3776.5,1380 3826.5,1380 3876.5,1380 3926.5,1380 3976.5,1380 4026.5,1380 4076.5,1380 4126.5,1380 4176.5,1380 4226.5,1380 4276.5,1380 734,1388.5 784,1388.5 834,1388.5 884,1388.5 934,1388.5 984,1388.5 1034,1388.5 1084,1388.5 1134,1388.5 1184,1388.5 2926.5,1430 2976.5,1430 3026.5,1430 3076.5,1430 3126.5,1430 3176.5,1430 3226.5,1430 3276.5,1430 3326.5,1430 3376.5,1430 3426.5,1430 3476.5,1430 3526.5,1430 3576.5,1430 3626.5,1430 3676.5,1430 3726.5,1430 3776.5,1430 3826.5,1430 3876.5,1430 3926.5,1430 3976.5,1430 4026.5,1430 4076.5,1430 4126.5,1430 4176.5,1430 4226.5,1430 4276.5,1430 138.5,1458.5 188.5,1458.5 238.5,1458.5 288.5,1458.5 338.5,1458.5 388.5,1458.5 438.5,1458.5 488.5,1458.5 538.5,1458.5 588.5,1458.5 638.5,1458.5 688.5,1458.5 738.5,1458.5 788.5,1458.5 838.5,1458.5 888.5,1458.5 938.5,1458.5 988.5,1458.5 1038.5,1458.5 1088.5,1458.5 1138.5,1458.5 1188.5,1458.5 1238.5,1458.5 1288.5,1458.5 1338.5,1458.5 1388.5,1458.5 1438.5,1458.5 1488.5,1458.5 2926.5,1480 2976.5,1480 3026.5,1480 3076.5,1480 3126.5,1480 3176.5,1480 3226.5,1480 3276.5,1480 3326.5,1480 3376.5,1480 3426.5,1480 3476.5,1480 3526.5,1480 3576.5,1480 3626.5,1480 3676.5,1480 3726.5,1480 3776.5,1480 3826.5,1480 3876.5,1480 3926.5,1480 3976.5,1480 4026.5,1480 4076.5,1480 4126.5,1480 4176.5,1480 4226.5,1480 4276.5,1480 138.5,1508.5 188.5,1508.5 238.5,1508.5 288.5,1508.5 338.5,1508.5 388.5,1508.5 438.5,1508.5 488.5,1508.5 538.5,1508.5 588.5,1508.5 638.5,1508.5 688.5,1508.5 738.5,1508.5 788.5,1508.5 838.5,1508.5 888.5,1508.5 938.5,1508.5 988.5,1508.5 1038.5,1508.5 1088.5,1508.5 1138.5,1508.5 1188.5,1508.5 1238.5,1508.5 1288.5,1508.5 1338.5,1508.5 1388.5,1508.5 1438.5,1508.5 1488.5,1508.5 2926.5,1530 2976.5,1530 3026.5,1530 3076.5,1530 3126.5,1530 3176.5,1530 3226.5,1530 3276.5,1530 3326.5,1530 3376.5,1530 3426.5,1530 3476.5,1530 3526.5,1530 3576.5,1530 3626.5,1530 3676.5,1530 3726.5,1530 3776.5,1530 3826.5,1530 3876.5,1530 3926.5,1530 3976.5,1530 4026.5,1530 4076.5,1530 4126.5,1530 4176.5,1530 4226.5,1530 4276.5,1530 138.5,1558.5 188.5,1558.5 238.5,1558.5 288.5,1558.5 338.5,1558.5 388.5,1558.5 438.5,1558.5 488.5,1558.5 538.5,1558.5 588.5,1558.5 638.5,1558.5 688.5,1558.5 738.5,1558.5 788.5,1558.5 838.5,1558.5 888.5,1558.5 938.5,1558.5 988.5,1558.5 1038.5,1558.5 1088.5,1558.5 1138.5,1558.5 1188.5,1558.5 1238.5,1558.5 1288.5,1558.5 1338.5,1558.5 1388.5,1558.5 1438.5,1558.5 1488.5,1558.5 2926.5,1580 2976.5,1580 3026.5,1580 3076.5,1580 3126.5,1580 3176.5,1580 3226.5,1580 3276.5,1580 3326.5,1580 3376.5,1580 3426.5,1580 3476.5,1580 3526.5,1580 3576.5,1580 3626.5,1580 3676.5,1580 3726.5,1580 3776.5,1580 3826.5,1580 3876.5,1580 3926.5,1580 3976.5,1580 4026.5,1580 4076.5,1580 4126.5,1580 4176.5,1580 4226.5,1580 4276.5,1580 2926.5,1630 2976.5,1630 3026.5,1630 3076.5,1630 3126.5,1630 3176.5,1630 3226.5,1630 3276.5,1630 3326.5,1630 3376.5,1630 3426.5,1630 3476.5,1630 3526.5,1630 3576.5,1630 3626.5,1630 3676.5,1630 3726.5,1630 3776.5,1630 3826.5,1630 3876.5,1630 3926.5,1630 3976.5,1630 4026.5,1630 4076.5,1630 4126.5,1630 4176.5,1630 4226.5,1630 4276.5,1630 1899,1672 1949,1672 1999,1672 2926.5,1680 2976.5,1680 3026.5,1680 3076.5,1680 3126.5,1680 3176.5,1680 3226.5,1680 3276.5,1680 3326.5,1680 3376.5,1680 3426.5,1680 3476.5,1680 3526.5,1680 3576.5,1680 3626.5,1680 3676.5,1680 3726.5,1680 3776.5,1680 3826.5,1680 3876.5,1680 3926.5,1680 3976.5,1680 4026.5,1680 4076.5,1680 4126.5,1680 4176.5,1680 4226.5,1680 4276.5,1680 938.5,1715.5 988.5,1715.5 1038.5,1715.5 1088.5,1715.5 1138.5,1715.5 1188.5,1715.5 1238.5,1715.5 1288.5,1715.5 1338.5,1715.5 1388.5,1715.5 1438.5,1715.5 1488.5,1715.5 1899,1722 1949,1722 1999,1722 2926.5,1730 2976.5,1730 3026.5,1730 3076.5,1730 3126.5,1730 3176.5,1730 3226.5,1730 3276.5,1730 3326.5,1730 3376.5,1730 3426.5,1730 3476.5,1730 3526.5,1730 3576.5,1730 3626.5,1730 3676.5,1730 3726.5,1730 3776.5,1730 3826.5,1730 3876.5,1730 3926.5,1730 3976.5,1730 4026.5,1730 4076.5,1730 4126.5,1730 4176.5,1730 4226.5,1730 4276.5,1730 938.5,1765.5 988.5,1765.5 1038.5,1765.5 1088.5,1765.5 1138.5,1765.5 1188.5,1765.5 1238.5,1765.5 1288.5,1765.5 1338.5,1765.5 1388.5,1765.5 1438.5,1765.5 1488.5,1765.5 1899,1772 1949,1772 1999,1772 2926.5,1780 2976.5,1780 3026.5,1780 3076.5,1780 3126.5,1780 3176.5,1780 3226.5,1780 3276.5,1780 3326.5,1780 3376.5,1780 3426.5,1780 3476.5,1780 3526.5,1780 3576.5,1780 3626.5,1780 3676.5,1780 3726.5,1780 3776.5,1780 3826.5,1780 3876.5,1780 3926.5,1780 3976.5,1780 4026.5,1780 4076.5,1780 4126.5,1780 4176.5,1780 4226.5,1780 4276.5,1780 943.5,1896 993.5,1896 1043.5,1896 1093.5,1896 1143.5,1896 1193.5,1896 1243.5,1896 1293.5,1896 1343.5,1896 1393.5,1896 1443.5,1896 1493.5,1896 4238.5,1923.5 4288.5,1923.5 4338.5,1923.5 4388.5,1923.5 943.5,1946 993.5,1946 1043.5,1946 1093.5,1946 1143.5,1946 1193.5,1946 1243.5,1946 1293.5,1946 1343.5,1946 1393.5,1946 1443.5,1946 1493.5,1946 4238.5,1973.5 4288.5,1973.5 4338.5,1973.5 4388.5,1973.5 4238.5,2023.5 4288.5,2023.5 4338.5,2023.5 4388.5,2023.5 4238.5,2073.5 4288.5,2073.5 4338.5,2073.5 4388.5,2073.5 4238.5,2123.5 4288.5,2123.5 4338.5,2123.5 4388.5,2123.5 1050,2163 1100,2163 1150,2163 1200,2163 1250,2163 1300,2163 1350,2163 4238.5,2173.5 4288.5,2173.5 4338.5,2173.5 4388.5,2173.5 1050,2213 1100,2213 1150,2213 1200,2213 1250,2213 1300,2213 1350,2213 4238.5,2223.5 4288.5,2223.5 4338.5,2223.5 4388.5,2223.5 160,2262.5 210,2262.5 260,2262.5 310,2262.5 360,2262.5 410,2262.5 460,2262.5 510,2262.5 560,2262.5 610,2262.5 660,2262.5 710,2262.5 760,2262.5 810,2262.5 860,2262.5 910,2262.5 960,2262.5 1050,2263 1100,2263 1150,2263 1200,2263 1250,2263 1300,2263 1350,2263 4238.5,2273.5 4288.5,2273.5 4338.5,2273.5 4388.5,2273.5 160,2312.5 210,2312.5 260,2312.5 310,2312.5 360,2312.5 410,2312.5 460,2312.5 510,2312.5 560,2312.5 610,2312.5 660,2312.5 710,2312.5 760,2312.5 810,2312.5 860,2312.5 910,2312.5 960,2312.5 1050,2313 1100,2313 1150,2313 1200,2313 1250,2313 1300,2313 1350,2313 4238.5,2323.5 4288.5,2323.5 4338.5,2323.5 4388.5,2323.5 160,2362.5 210,2362.5 260,2362.5 310,2362.5 360,2362.5 410,2362.5 460,2362.5 510,2362.5 560,2362.5 610,2362.5 660,2362.5 710,2362.5 760,2362.5 810,2362.5 860,2362.5 910,2362.5 960,2362.5 4238.5,2373.5 4288.5,2373.5 4338.5,2373.5 4388.5,2373.5 2825.5,2423 2875.5,2423 2925.5,2423 2975.5,2423 3025.5,2423 3075.5,2423 3125.5,2423 4238.5,2423.5 4288.5,2423.5 4338.5,2423.5 4388.5,2423.5 2825.5,2473 2875.5,2473 2925.5,2473 2975.5,2473 3025.5,2473 3075.5,2473 3125.5,2473 4238.5,2473.5 4288.5,2473.5 4338.5,2473.5 4388.5,2473.5 2825.5,2523 2875.5,2523 2925.5,2523 2975.5,2523 3025.5,2523 3075.5,2523 3125.5,2523 510.5,2524.5 560.5,2524.5 610.5,2524.5 660.5,2524.5 710.5,2524.5 760.5,2524.5 810.5,2524.5 860.5,2524.5 910.5,2524.5 960.5,2524.5 1010.5,2524.5 1060.5,2524.5 4238.5,2523.5 4288.5,2523.5 4338.5,2523.5 4388.5,2523.5 2825.5,2573 2875.5,2573 2925.5,2573 2975.5,2573 3025.5,2573 3075.5,2573 3125.5,2573 4238.5,2573.5 4288.5,2573.5 4338.5,2573.5 4388.5,2573.5 2825.5,2623 2875.5,2623 2925.5,2623 2975.5,2623 3025.5,2623 3075.5,2623 3125.5,2623 4238.5,2623.5 4288.5,2623.5 4338.5,2623.5 4388.5,2623.5 1459.5,2636.5 1509.5,2636.5 1559.5,2636.5 1609.5,2636.5 1659.5,2636.5 1709.5,2636.5 1759.5,2636.5 4238.5,2673.5 4288.5,2673.5 4338.5,2673.5 4388.5,2673.5 1459.5,2686.5 1509.5,2686.5 1559.5,2686.5 1609.5,2686.5 1659.5,2686.5 1709.5,2686.5 1759.5,2686.5 509,2713.5 559,2713.5 609,2713.5 659,2713.5 709,2713.5 759,2713.5 809,2713.5 859,2713.5 909,2713.5 959,2713.5 1009,2713.5 4238.5,2723.5 4288.5,2723.5 4338.5,2723.5 4388.5,2723.5 1459.5,2736.5 1509.5,2736.5 1559.5,2736.5 1609.5,2736.5 1659.5,2736.5 1709.5,2736.5 1759.5,2736.5 4238.5,2773.5 4288.5,2773.5 4338.5,2773.5 4388.5,2773.5 1459.5,2786.5 1509.5,2786.5 1559.5,2786.5 1609.5,2786.5 1659.5,2786.5 1709.5,2786.5 1759.5,2786.5 3440.5,2822 3490.5,2822 3540.5,2822 3590.5,2822 4238.5,2823.5 4288.5,2823.5 4338.5,2823.5 4388.5,2823.5 3440.5,2872 3490.5,2872 3540.5,2872 3590.5,2872 4238.5,2873.5 4288.5,2873.5 4338.5,2873.5 4388.5,2873.5 501.5,2887.5 551.5,2887.5 601.5,2887.5 651.5,2887.5 701.5,2887.5 751.5,2887.5 801.5,2887.5 851.5,2887.5 901.5,2887.5 951.5,2887.5 3440.5,2922 3490.5,2922 3540.5,2922 3590.5,2922 4238.5,2923.5 4288.5,2923.5 4338.5,2923.5 4388.5,2923.5 3440.5,2972 3490.5,2972 3540.5,2972 3590.5,2972 4238.5,2973.5 4288.5,2973.5 4338.5,2973.5 4388.5,2973.5 3440.5,3022 3490.5,3022 3540.5,3022 3590.5,3022 4238.5,3023.5 4288.5,3023.5 4338.5,3023.5 4388.5,3023.5 499.5,3057.5 549.5,3057.5 599.5,3057.5 649.5,3057.5 699.5,3057.5 749.5,3057.5 799.5,3057.5 849.5,3057.5 1004,3062.5 1054,3062.5 1104,3062.5 1154,3062.5 1204,3062.5 1842,3062.5 1892,3062.5 1942,3062.5 1992,3062.5 2042,3062.5 2640.5,3069.5 2690.5,3069.5 2740.5,3069.5 2790.5,3069.5 2840.5,3069.5 3440.5,3072 3490.5,3072 3540.5,3072 3590.5,3072 4238.5,3073.5 4288.5,3073.5 4338.5,3073.5 4388.5,3073.5 1004,3112.5 1054,3112.5 1104,3112.5 1154,3112.5 1204,3112.5 1842,3112.5 1892,3112.5 1942,3112.5 1992,3112.5 2042,3112.5 2640.5,3119.5 2690.5,3119.5 2740.5,3119.5 2790.5,3119.5 2840.5,3119.5 3440.5,3122 3490.5,3122 3540.5,3122 3590.5,3122 4238.5,3123.5 4288.5,3123.5 4338.5,3123.5 4388.5,3123.5 1004,3162.5 1054,3162.5 1104,3162.5 1154,3162.5 1204,3162.5 1842,3162.5 1892,3162.5 1942,3162.5 1992,3162.5 2042,3162.5 2640.5,3169.5 2690.5,3169.5 2740.5,3169.5 2790.5,3169.5 2840.5,3169.5 109.5,3229.5 159.5,3229.5 209.5,3229.5 259.5,3229.5 309.5,3229.5 109.5,3279.5 159.5,3279.5 209.5,3279.5 259.5,3279.5 309.5,3279.5 557.5,3289 607.5,3289 657.5,3289 707.5,3289 109.5,3329.5 159.5,3329.5 209.5,3329.5 259.5,3329.5 309.5,3329.5 557.5,3339 607.5,3339 657.5,3339 707.5,3339 557.5,3389 607.5,3389 657.5,3389 707.5,3389 557.5,3439 607.5,3439 657.5,3439 707.5,3439 557.5,3489 607.5,3489 657.5,3489 707.5,3489 560.5,3620.5 610.5,3620.5 660.5,3620.5 710.5,3620.5 560.5,3670.5 610.5,3670.5 660.5,3670.5 710.5,3670.5 4233.5,3683.5 4283.5,3683.5 4333.5,3683.5 4383.5,3683.5 560.5,3720.5 610.5,3720.5 660.5,3720.5 710.5,3720.5 4233.5,3733.5 4283.5,3733.5 4333.5,3733.5 4383.5,3733.5 560.5,3770.5 610.5,3770.5 660.5,3770.5 710.5,3770.5 2676.5,3779.5 2726.5,3779.5 2776.5,3779.5 2826.5,3779.5 3476,3779.5 3526,3779.5 3576,3779.5 3626,3779.5 4233.5,3783.5 4283.5,3783.5 4333.5,3783.5 4383.5,3783.5 1885.5,3788.5 1935.5,3788.5 1985.5,3788.5 2035.5,3788.5 560.5,3820.5 610.5,3820.5 660.5,3820.5 710.5,3820.5 1466,3824 1566,3824 2266,3824 2366,3824 3066,3824 3166,3824 3866,3824 3966,3824 2676.5,3829.5 2726.5,3829.5 2776.5,3829.5 2826.5,3829.5 3476,3829.5 3526,3829.5 3576,3829.5 3626,3829.5 4233.5,3833.5 4283.5,3833.5 4333.5,3833.5 4383.5,3833.5 1885.5,3838.5 1935.5,3838.5 1985.5,3838.5 2035.5,3838.5 560.5,3870.5 610.5,3870.5 660.5,3870.5 710.5,3870.5 2676.5,3879.5 2726.5,3879.5 2776.5,3879.5 2826.5,3879.5 3476,3879.5 3526,3879.5 3576,3879.5 3626,3879.5 4233.5,3883.5 4283.5,3883.5 4333.5,3883.5 4383.5,3883.5 1885.5,3888.5 1935.5,3888.5 1985.5,3888.5 2035.5,3888.5 560.5,3920.5 610.5,3920.5 660.5,3920.5 710.5,3920.5 2676.5,3929.5 2726.5,3929.5 2776.5,3929.5 2826.5,3929.5 3476,3929.5 3526,3929.5 3576,3929.5 3626,3929.5 4233.5,3933.5 4283.5,3933.5 4333.5,3933.5 4383.5,3933.5 1885.5,3938.5 1935.5,3938.5 1985.5,3938.5 2035.5,3938.5 1466,3974 1566,3974 2266,3974 2366,3974 3066,3974 3166,3974 3866,3974 3966,3974 2676.5,3979.5 2726.5,3979.5 2776.5,3979.5 2826.5,3979.5 3476,3979.5 3526,3979.5 3576,3979.5 3626,3979.5 4233.5,3983.5 4283.5,3983.5 4333.5,3983.5 4383.5,3983.5 1885.5,3988.5 1935.5,3988.5 1985.5,3988.5 2035.5,3988.5 2676.5,4029.5 2726.5,4029.5 2776.5,4029.5 2826.5,4029.5 3476,4029.5 3526,4029.5 3576,4029.5 3626,4029.5 4233.5,4033.5 4283.5,4033.5 4333.5,4033.5 4383.5,4033.5 1885.5,4038.5 1935.5,4038.5 1985.5,4038.5 2035.5,4038.5 2676.5,4079.5 2726.5,4079.5 2776.5,4079.5 2826.5,4079.5 3476,4079.5 3526,4079.5 3576,4079.5 3626,4079.5 4233.5,4083.5 4283.5,4083.5 4333.5,4083.5 4383.5,4083.5 1885.5,4088.5 1935.5,4088.5 1985.5,4088.5 2035.5,4088.5
  other v3: 2249,2242 2279.5,2242 2309.5,2242.5
IREF_AMP: C31.2 C32.2 C33.2 C34.2 C35.2 HDR_IREF2.3 HDR_IREF2.4 UTX.17 | length 2613
  Top Layer w5: v1(1944.5,2621.5) 1995,2621.5 2262,2354.5 UTX.17
  Top Layer w20: HDR_IREF2.3@92,1958 382,1958 435.68,2011.68 C31.2 508.28,2010.4 805.72,2010.4 C35.2 1331.12,2009.12 v1(1636.5,2314.5)
  Bottom Layer w20: v1(1636.5,2314.5) 1943.5,2621.5 v1(1944.5,2621.5)
IREF_CLK: C26.2 C27.2 C28.2 C29.2 C30.2 HDR_IREF2.7 HDR_IREF2.8 UTX.10 | length 2476.6
  Top Layer w10: v1(2274,2128.5) UTX.10
  Top Layer w20: HDR_IREF2.7@92,1758 HDR_IREF2.8@286,1758 ; HDR_IREF2.8 313,1742 398,1742 483.44,1656.56 C26.2 C27.2 C28.2 C29.2 C30.2 811.44,1661 v1(1609,1661)
  Bottom Layer w20: v1(1609,1661) 1806.5,1661 v1(2274,2128.5)
IREFN_DP: C41.2 C42.2 C43.2 C44.2 C45.2 HDR_IREF2.5 HDR_IREF2.6 UTX.11 | length 2707.7
  Top Layer w10: UTX.11 2372.5,2184.5 v1(2372.5,2176)
  Top Layer w20: HDR_IREF2.5@92,1858 HDR_IREF2.6@331,1858 ; HDR_IREF2.6 428,1857 456,1829 504.44,1829 C41.2 C42.2 C43.2 C44.2 C45.2 808.44,1833 812.94,1828.5 v1(1367,1828.5)
  Bottom Layer w20: v1(1367,1828.5) 1588.5,1607 1803.5,1607 v1(2372.5,2176)
IREFP_DP: C36.2 C37.2 C38.2 C39.2 C40.2 HDR_IREF2.1 HDR_IREF2.2 UTX.12 | length 3305.1
  Top Layer w10: UTX.12 v1(2509.5,2285)
  Top Layer w20: HDR_IREF2.1@92,2058 HDR_IREF2.2@285,2058 ; HDR_IREF2.2@278.5,2051.5 HDR_IREF2.2@285,2058 ; HDR_IREF2.2 338.47,2057 HDR_IREF2.2@358,2076.53 ; HDR_IREF2.2@298,2058 HDR_IREF2.2@285,2058 ; v1(930.5,2205.5) 808.06,2205.5 C40.2 C39.2 C38.2 C37.2 C36.2 502.44,2202 429,2202 HDR_IREF2.2@285,2058
  Bottom Layer w20: v1(930.5,2205.5) 1572,1564 1815,1564 2509.5,2258.5 v1(2509.5,2285)
NC0: VRVDDD.3
NC1: VRVCLK.3
NC2: VRVDP.3
NC3: VRVDRV.3
NC4: VRVBIAS.3
NC5: VRVAMP.3
NetCVAMP0_1: CVAMP0.1 RVAMP.1 UVAMP.5 VRVAMP.1 | length 730.5
  Top Layer w25: UVAMP.5@4052.3,3466.49 4110.56,3408.23 CVAMP0.1@4110.56,3098.5 ; UVAMP.5@4056.06,3536 4301.36,3536 4316,3521.36 VRVAMP.1
NetCVBIAS0_1: CVBIAS0.1 RVBIAS.1 UVBIAS.5 VRVBIAS.1 | length 730.5
  Top Layer w25: UVBIAS.5@3250.3,3466.49 3308.56,3408.23 CVBIAS0.1@3308.56,3098.5 ; UVBIAS.5@3256.06,3536 3501.36,3536 3516,3521.36 VRVBIAS.1
NetCVCLK0_1: CVCLK0.1 RVCLK.1 UVCLK.5 VRVCLK.1 | length 745.6
  Top Layer w25: UVCLK.5@1847,514.06 1847,759.36 1861.64,774 VRVCLK.1 ; UVCLK.5@1915.5,508 1963.2,555.7 2247.44,555.7 CVCLK0.1@2302.99,555.7
NetCVDDD0_1: CVDDD0.1 RVDDD.1 UVDDD.5 VRVDDD.1 | length 732.7
  Top Layer w25: UVDDD.5@1853.2,1307.86 1847,1314.06 1847,1559.36 1861.64,1574 VRVDDD.1 ; UVDDD.5 1914.51,1307.86 1962.21,1355.56 2174.5,1355.56 CVDDD0.1@2236,1355.56
NetCVDP0_1: CVDP0.1 RVDP.1 UVDP.5 VRVDP.1 | length 776.4
  Top Layer w25: UVDP.5@1650.99,3511.65 UVDP.5 1649.86,3468.49 1708.12,3410.23 CVDP0.1@1708.12,3100.5 ; UVDP.5@1656.06,3536 1901.36,3536 1916,3521.36 VRVDP.1
NetCVDRV0_1: CVDRV0.1 RVDRV.1 UVDRV.5 VRVDRV.1 | length 730.5
  Top Layer w25: UVDRV.5@2450.3,3468.49 2508.56,3410.23 CVDRV0.1@2508.56,3100.5 ; UVDRV.5@2456.06,3536 2701.36,3536 2716,3521.36 VRVDRV.1
NetR0R0_2: R0R0.2 UVDDD.4 | length 216.9
  Top Layer w30: UVDDD.4 UVDDD.4@1872.96,1238.19 ; R0R0.2@2084.28,1238.19 R0R0.2
  Top Layer w40: UVDDD.4@1872.96,1238.19 R0R0.2@2084.28,1238.19
NetR0R1_2: R0R1.2 UVCLK.4 | length 214.8
  Top Layer w30: UVCLK.4 UVCLK.4@1871.46,439.69 ; R0R1.2@2082.78,439.69 R0R1.2
  Top Layer w40: UVCLK.4@1871.46,439.69 R0R1.2@2082.78,439.69
NetR0R2_2: R0R2.2 UVDP.4 | length 200.5
  Top Layer w25: 1582.93,3318.04 R0R2.2@1586.97,3314
  Top Layer w40: 1582.93,3318.04 UVDP.4
NetR0R3_2: R0R3.2 UVDRV.4 | length 194.7
  Top Layer w40: R0R3.2@2382.5,3301.26 UVDRV.4@2382.5,3496
NetR0R4_2: R0R4.2 UVBIAS.4 | length 194.7
  Top Layer w40: 3182.93,3318.04 UVBIAS.4
NetR0R5_2: R0R5.2 UVAMP.4 | length 194.7
  Top Layer w40: 3982.93,3318.04 UVAMP.4
SCAN_CLKA: HDR_SCAN2.6 HDR_SCAN2.12 UTX.7 | length 2837.7
  Top Layer w5: HDR_SCAN2.6 HDR_SCAN2.12 ; v1(2151.5,2184.5) 2153,2184.5 2166.5,2198 UTX.7
  Top Layer w10: HDR_SCAN2.12 v1(465,3519)
  Bottom Layer w8: v1(465,3519) 517,3519 586,3450 586,3180.5 1634.5,2132 2099,2132 v1(2151.5,2184.5)
SCAN_CLKB: HDR_SCAN2.5 HDR_SCAN2.11 UTX.6 | length 2914.9
  Top Layer w5: v1(2091.5,2183.5) 2094.5,2183.5 2123,2212 UTX.6
  Top Layer w8: HDR_SCAN2.5 HDR_SCAN2.11
  Top Layer w10: HDR_SCAN2.11 v1(469,3619)
  Bottom Layer w8: v1(469,3619) 531.5,3619 604,3546.5 604,3192 1640,2156 2063,2156 2090.5,2183.5 v1(2091.5,2183.5)
SCAN_IN: HDR_SCAN2.3 HDR_SCAN2.9 UTX.4 | length 2946.2
  Top Layer w5: HDR_SCAN2.3 HDR_SCAN2.9 ; v1(1541,2367) 1542.5,2365.5 2005.5,2365.5 2117,2254 UTX.4
  Top Layer w10: HDR_SCAN2.9 v1(469,3819)
  Bottom Layer w8: v1(469,3819) 514,3819 640,3693 640,3268 v1(1541,2367)
SCAN_OUT: HDR_SCAN2.1 HDR_SCAN2.7 UTX.2 | length 3056.3
  Top Layer w5: v1@1638,2423 v1(1640,2425) 2006,2425 2007.5,2423.5 2149,2282 UTX.2
  Top Layer w10: HDR_SCAN2.1 HDR_SCAN2.7 v1(469,4019)
  Bottom Layer w8: v1(469,4019) 532.5,4019 681,3870.5 681,3384 v1(1640,2425)
SCAN_SEL: HDR_SCAN2.2 HDR_SCAN2.8 UTX.3 | length 3001.7
  Top Layer w5: HDR_SCAN2.2 HDR_SCAN2.8 ; v1(1595.5,2393) 2008,2393 2133,2268 UTX.3
  Top Layer w10: HDR_SCAN2.8 v1(469,3919)
  Bottom Layer w8: v1(469,3919) 528.5,3919 660,3787.5 660,3328.5 v1(1595.5,2393)
SCAN_UPDATE: HDR_SCAN2.4 HDR_SCAN2.10 UTX.5 | length 2972.3
  Top Layer w5: HDR_SCAN2.4 HDR_SCAN2.10 ; v1(2036,2185) 2077,2226 UTX.5
  Top Layer w10: HDR_SCAN2.10 v1(469,3719)
  Bottom Layer w8: v1(469,3719) 517,3719 624,3612 624,3199 1638,2185 v1(2036,2185)
VDD33: CV33VAMP.2 CV33VBIAS.2 CV33VCLK.2 CV33VDDD.2 CV33VDP.2 CV33VDRV.2 HDR_SUP0.3 HDR_SUP0.5 HDR_SUP1.3 HDR_SUP1.5 HDR_SUP2.3 HDR_SUP2.5 P0VDD33.1 UVAMP.2 UVBIAS.2 UVCLK.2 UVDDD.2 UVDP.2 UVDRV.2 | length 3156.4
  Top Layer w40: v2@1361.5,3021 v2(1361.5,3118.5) 1360.75,3119.25 1360.75,3216.75 v2(1360,3217.5) 1373.91,3217.5 1453.44,3297.03 CV33VDP.2 1453.44,3300.97 1449.07,3305.34 UVDP.2 ; UVCLK.2 2077.66,307.07 CV33VCLK.2@2082.03,311.44 ; UVDDD.2 2077.66,1107.07 2082.03,1111.44 2089.99,1103.49 2091.95,1103.49 v2@2163.53,1031.91 ; CV33VCLK.2 CV33VCLK.2@2082.03,311.44 ; v2@2160.75,3121.22 v2@2160.75,3218.72 ; v2@2161.5,3022.97 v2(2161.5,3120.47) ; v2@2161.56,231.91 CV33VCLK.2@2082.03,311.44 ; v2@2162.31,218.75 v2@2259.81,218.75 ; v2@2164.28,1018.75 v2@2261.78,1018.75 ; v2@2173.91,3219.47 CV33VDRV.2 2253.44,3300.97 2249.07,3305.34 UVDRV.2 ; v2(2260.56,219.5) v2@2358.06,219.5 ; v2(2262.53,1019.5) v2@2360.03,1019.5 ; v2@2960.75,3121.22 v2@2960.75,3218.72 ; v2@2961.5,3022.97 v2(2961.5,3120.47) ; v2@2973.91,3219.47 CV33VBIAS.2 3053.44,3300.97 3049.07,3305.34 UVBIAS.2 ; v2@3760.75,3123.19 v2@3760.75,3220.69 ; v2@3761.5,3024.94 v2(3761.5,3122.44) ; v2@3773.91,3221.44 CV33VAMP.2@3853.44,3300.97 ; UVAMP.2 3849.07,3305.34 CV33VAMP.2@3853.44,3300.97 ; CV33VAMP.2 CV33VAMP.2@3853.44,3300.97
  other v1: 914,374 914,474 175,895.99 275,895.99 375,895.99 475,895.99 575,895.99 175,995.99 275,995.99 375,995.99 475,995.99 575,995.99 175,1095.99 275,1095.99 375,1095.99 475,1095.99 575,1095.99 175,1195.99 275,1195.99 375,1195.99 475,1195.99 575,1195.99 175,1295.99 275,1295.99 375,1295.99 475,1295.99 575,1295.99 927,3585 1027,3585 928,3986 1028,3986
  other v2: 2161.56,218 2358.81,220.25 2163.53,1018 2360.78,1020.25 1362.25,3020.25 2162.25,3022.22 2962.25,3022.22 3762.25,3024.19 2160,3219.47 2960,3219.47 3760,3221.44
VDDA_AMP: CVAMP0.2 CVAMP1.2 CVAMP2.2 CVAMP3.2 CVAMP4.2 CVAMP5.2 R0R5.1 RVAMP.2 UTX.13
VDDA_BIAS: CVBAIS4.2 CVBIAS0.2 CVBIAS1.2 CVBIAS2.2 CVBIAS3.2 CVBIAS5.2 R0R4.1 RVBIAS.2 UTX.14
VDDA_CLK: CVCLK0.2 CVCLK1.2 CVCLK2.2 CVCLK3.2 CVCLK4.2 CVCLK5.2 R0R1.1 RVCLK.2 UTX.9
VDDA_DP: CVDP0.2 CVDP1.2 CVDP2.2 CVDP3.2 CVDP4.2 CVDP5.2 R0R2.1 RVDP.2 UTX.16
VDDA_DRV: CVDRV0.2 CVDRV1.2 CVDRV2.2 CVDRV3.2 CVDRV4.2 CVDRV5.2 R0R3.1 RVDRV.2 UTX.15
VDDD: CVDDD0.2 CVDDD1.2 CVDDD2.2 CVDDD3.2 CVDDD4.2 CVDDD5.2 R0R0.1 RVDDD.2 UTX.8
pads on no net: HDR_VBIAS1.6 HDR_VBIAS1.12

## Polygon pours and split planes (outlines as drawn)
GND on Top Layer "Top Layer-GND" (solid, pour order 201): 0,0 4482,0 4482,4168 0,4168
VDDA_AMP on Top Layer "Top Layer-VDDA_AMP" (solid, pour order 199): 4150.5,1906.97 4150.5,3604.5 3917,3604.5 3917,2960 3292,2335 2487.5,2335 2375.5,2335 2337.5,2297 2337.5,2251 2663,2251 2663,1908 2663.97,1907.03
VDDA_CLK on Top Layer "Top Layer-VDDA_CLK" (solid, pour order 181): 1770,377.5 2743,377.5 2743,1612.5 2336,2019.5 2336,2203 2275.5,2203 2244,2203 2233,2203 2233,2164 2164,2164 1925.5,1925.5 2316,1535 2316,617 1770,617
VDDD on Top Layer "Top Layer-VDDD" (solid, pour order 163): 2283.5,1174 2283.5,1415 1816,1415 1816,1912 2141,2237 2207,2237 2207,2245 2094,2245 2047.5,2291.5 1646.5,2291.5 1646.5,1174
no net on Top Layer "Top Layer-No Net 5" (solid, pour order 191): 0,0
VDDA_BIAS on Top Layer "Top Layer-VDDA_BIAS" (solid, pour order 127): 2323.5,2280 2328.5,2280 2328.5,2297.5 2373.5,2342.5 2497,2342.5 2562.5,2408 2562.5,2466 2562.5,2699 3344.5,2699 3344.5,3605.5 3138.5,3605.5 3138.5,2893 2481,2893 2481,2469.25 2323.5,2312.25 2323.5,2297.5
VDDA_DRV on Top Layer "Top Layer-No Net 6" (solid, pour order 185): 2407,2407 2407,2929.5 2560.5,2929.5 2560.5,3603 2309.5,3603 2309.5,3056.5 2309.5,2567.5 2309.5,2294 2309.5,2280 2314.5,2280 2314.5,2294 2314.5,2299.5 2314.5,2314.5
VDDA_DP on Top Layer "Top Layer-No Net" (solid, pour order 73): 1518.5,3603 1518.5,2843 1812,2843 2273,2382 2273,2280 2301,2280 2301,2541.5 1776,3066.5 1776,3603
no net on Top Layer "Top Layer-No Net 2" (solid, pour order 147): 1945.5,1008
no net on Top Layer "Top Layer-No Net 3" (solid, pour order 137): 2422.5,2165
no net on Top Layer "Top Layer-No Net 4" (solid, pour order 125): 2326,2297.5
no net on Top Layer "Top Layer-No Net 1" (solid, pour order 87): 2367,2323.5
no net on Bottom Layer "Bottom Layer-No Net" (solid, pour order 195): 0,0 4482,0 4482,4168 0,4168
GND on GND (split plane): 4461.9,20.1 20.1,20.1 20.1,4147.9 4461.9,4147.9
VDD33 on VDD (split plane): 4461.9,20.1 20.1,20.1 20.1,4147.9 4461.9,4147.9

## Keep-outs
Keep-Out Layer:
  lines w5: 4482,0 0,0 0,4168 4482,4168

## Silkscreen, mask and mechanical layers (free items; w line width, h text height)
Top Overlay:
  drawing of 633 lines, arcs and shapes, not listed
  text "200Gbps TX Testboard V2" at 3699,519 h30
  text "August 2020" at 3891,448 h30
Mechanical 1:
  the board outline again, w1